# Altium PCB ESC_S1.PcbDoc
Units mil, origin at the board's own origin, x right, y up, seen from the top; angles counter-clockwise.
Board outline 1797 x 1751 mil, 4 copper layers (L1, L2, L3, L4), stack 23.756 mil thick; 77 components, 53 nets, 246 pads, 314 vias.
Unrouted connection lines stored in the file: 151.
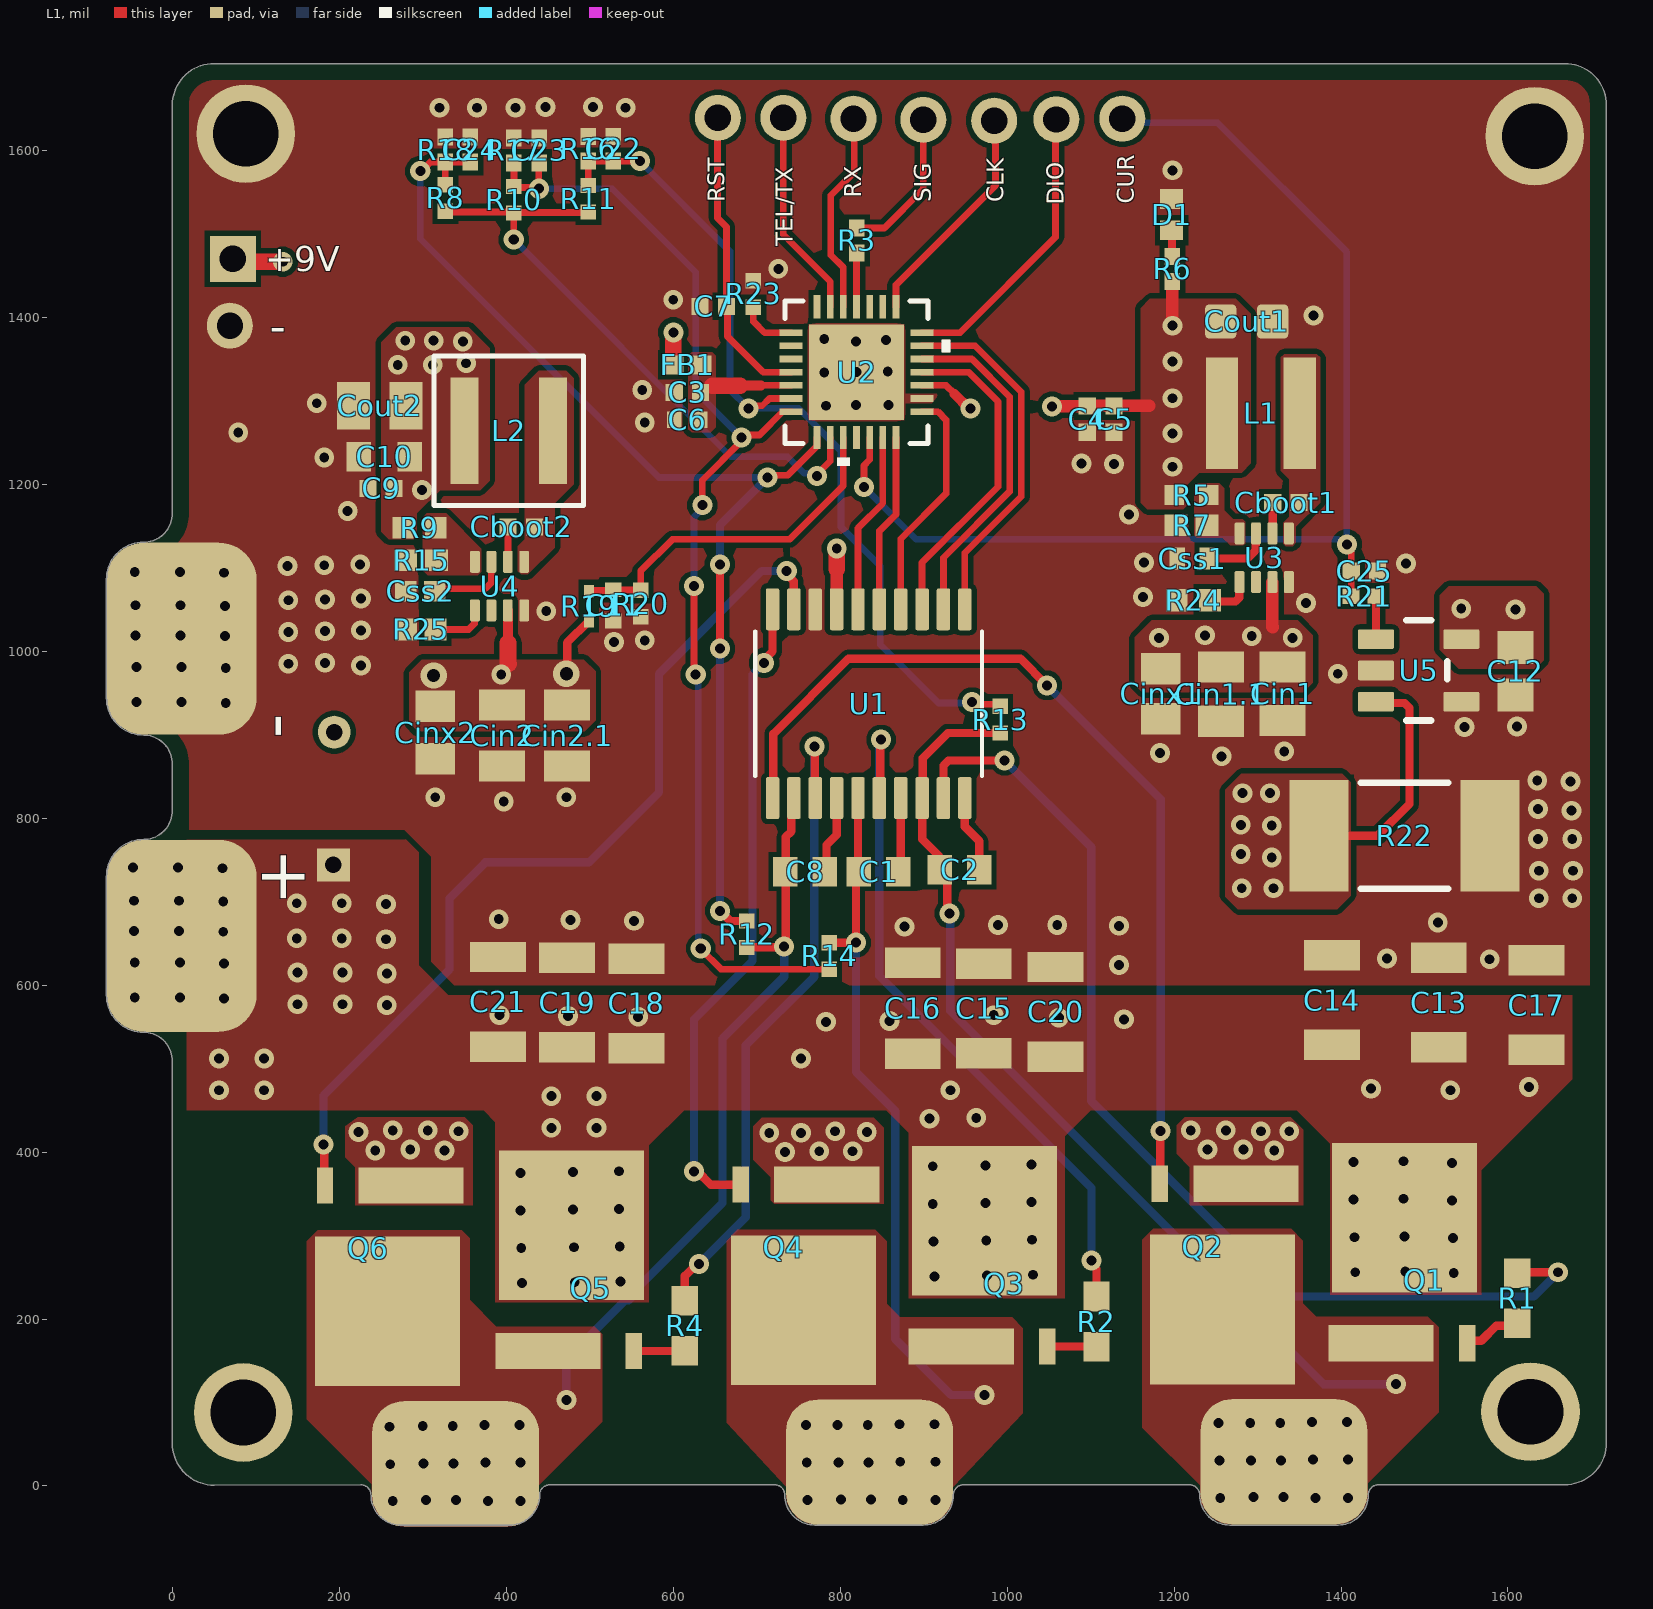
[diagram p0: L1 view]
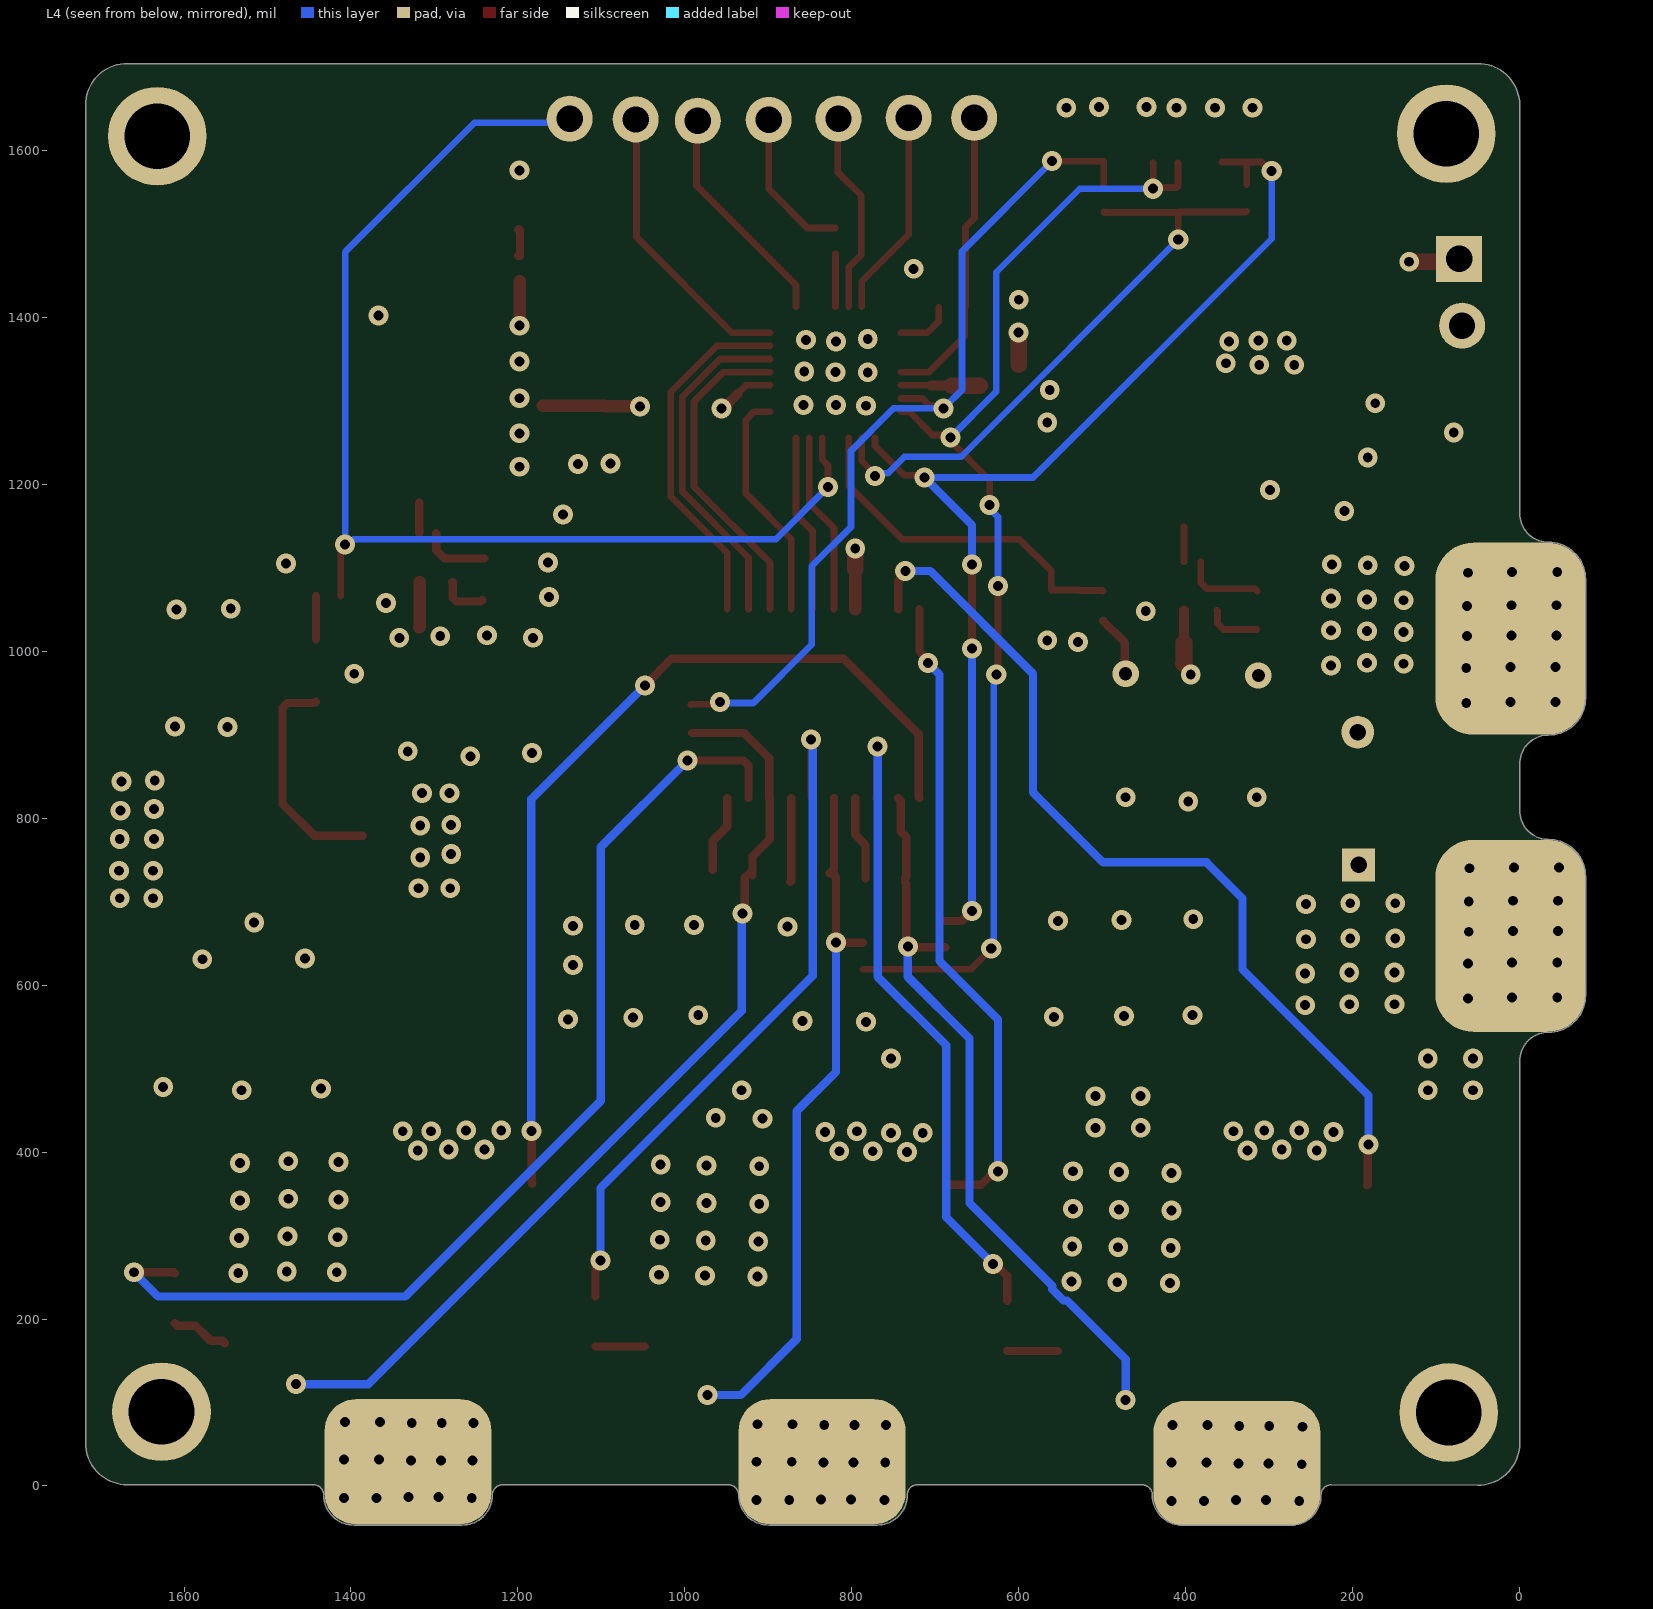
[diagram p1: L4 view, seen from below]
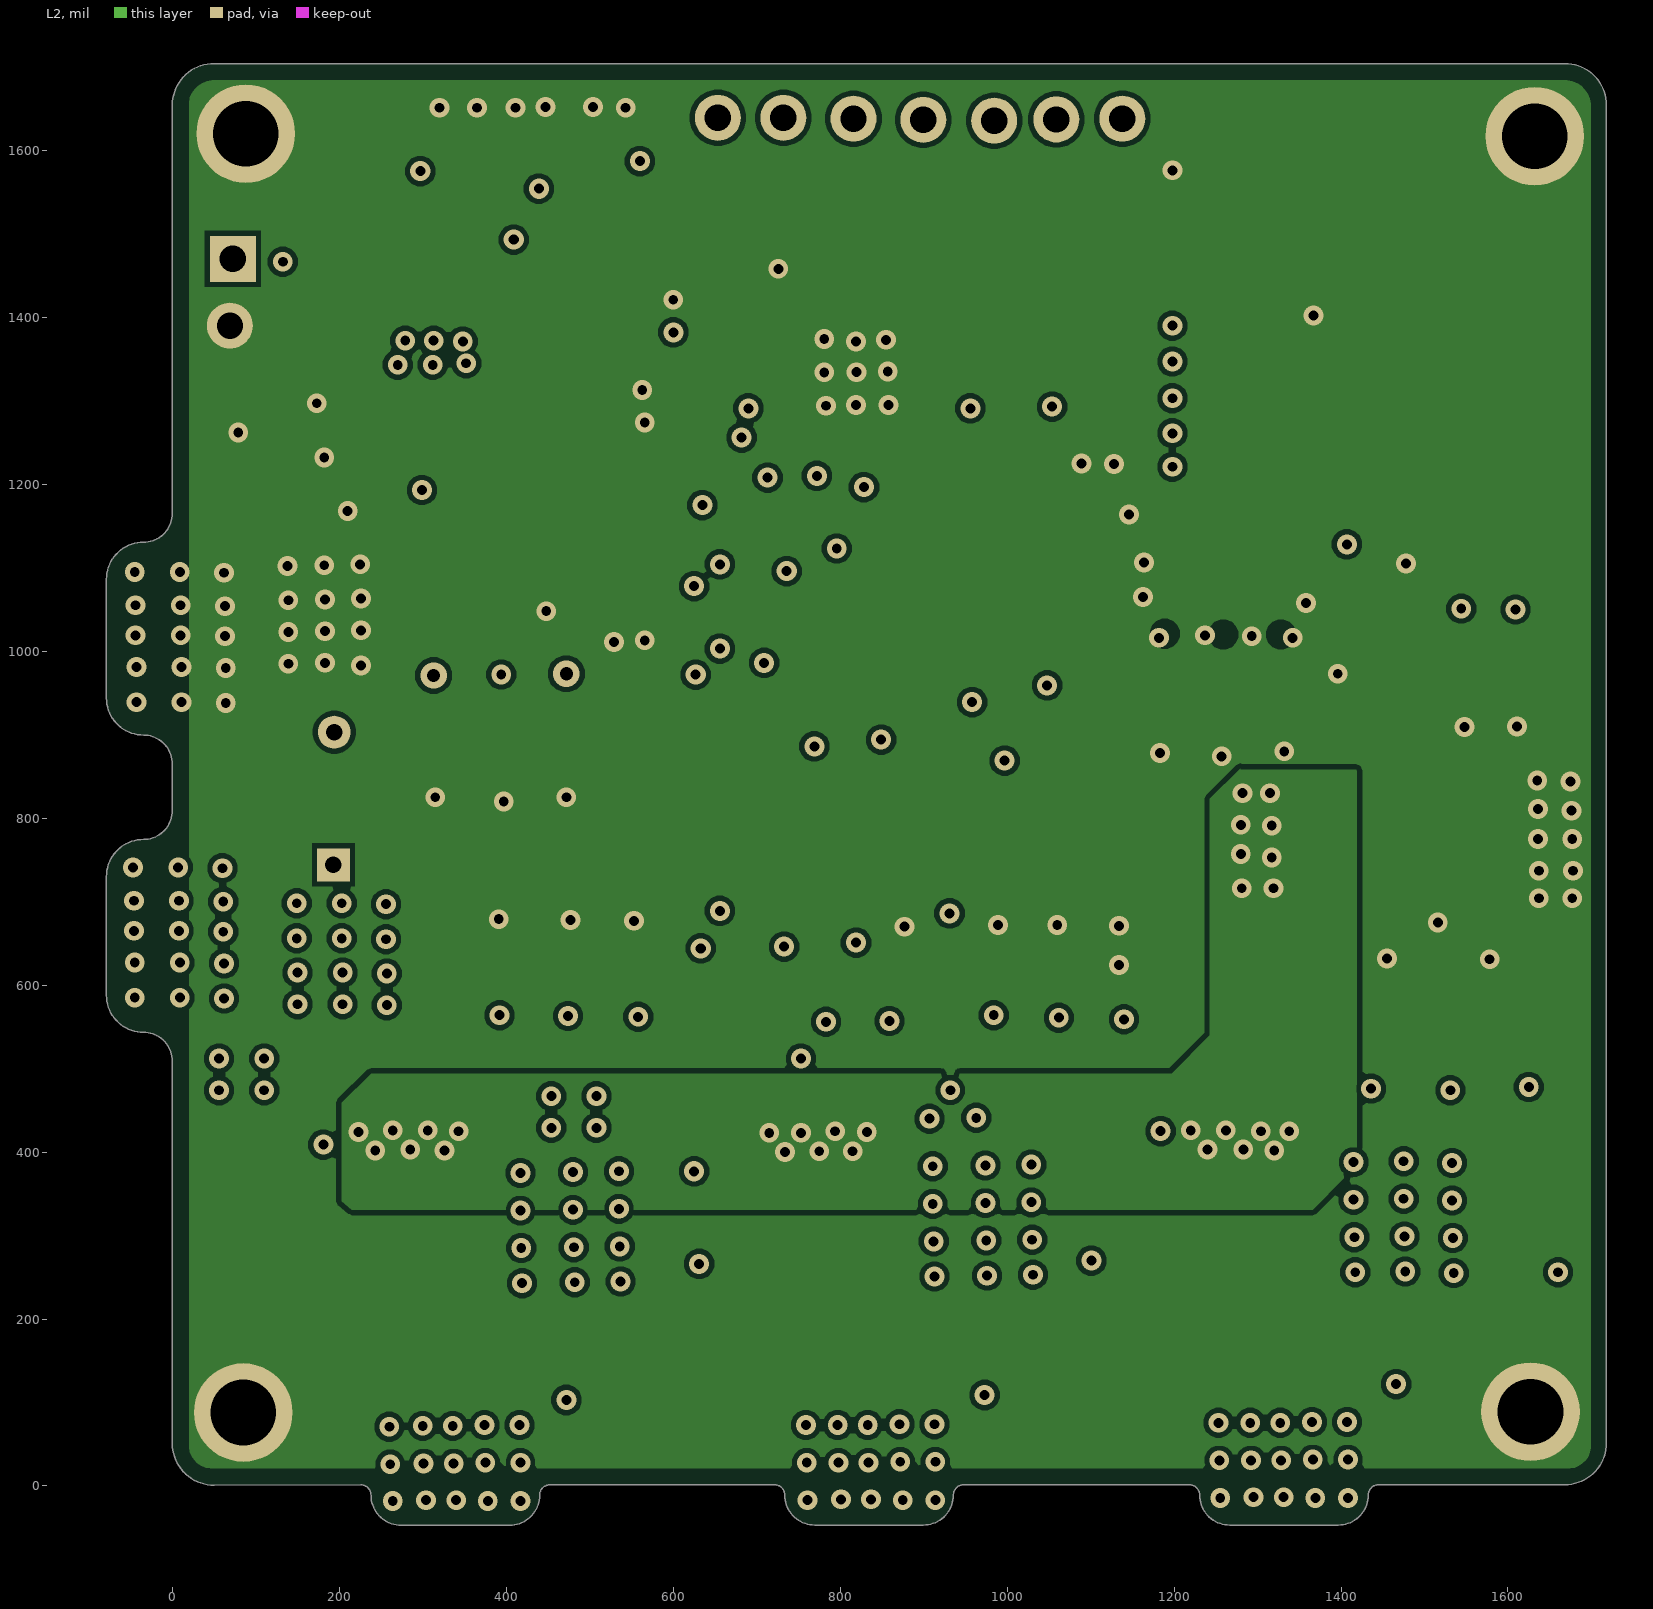
[diagram p2: L2]
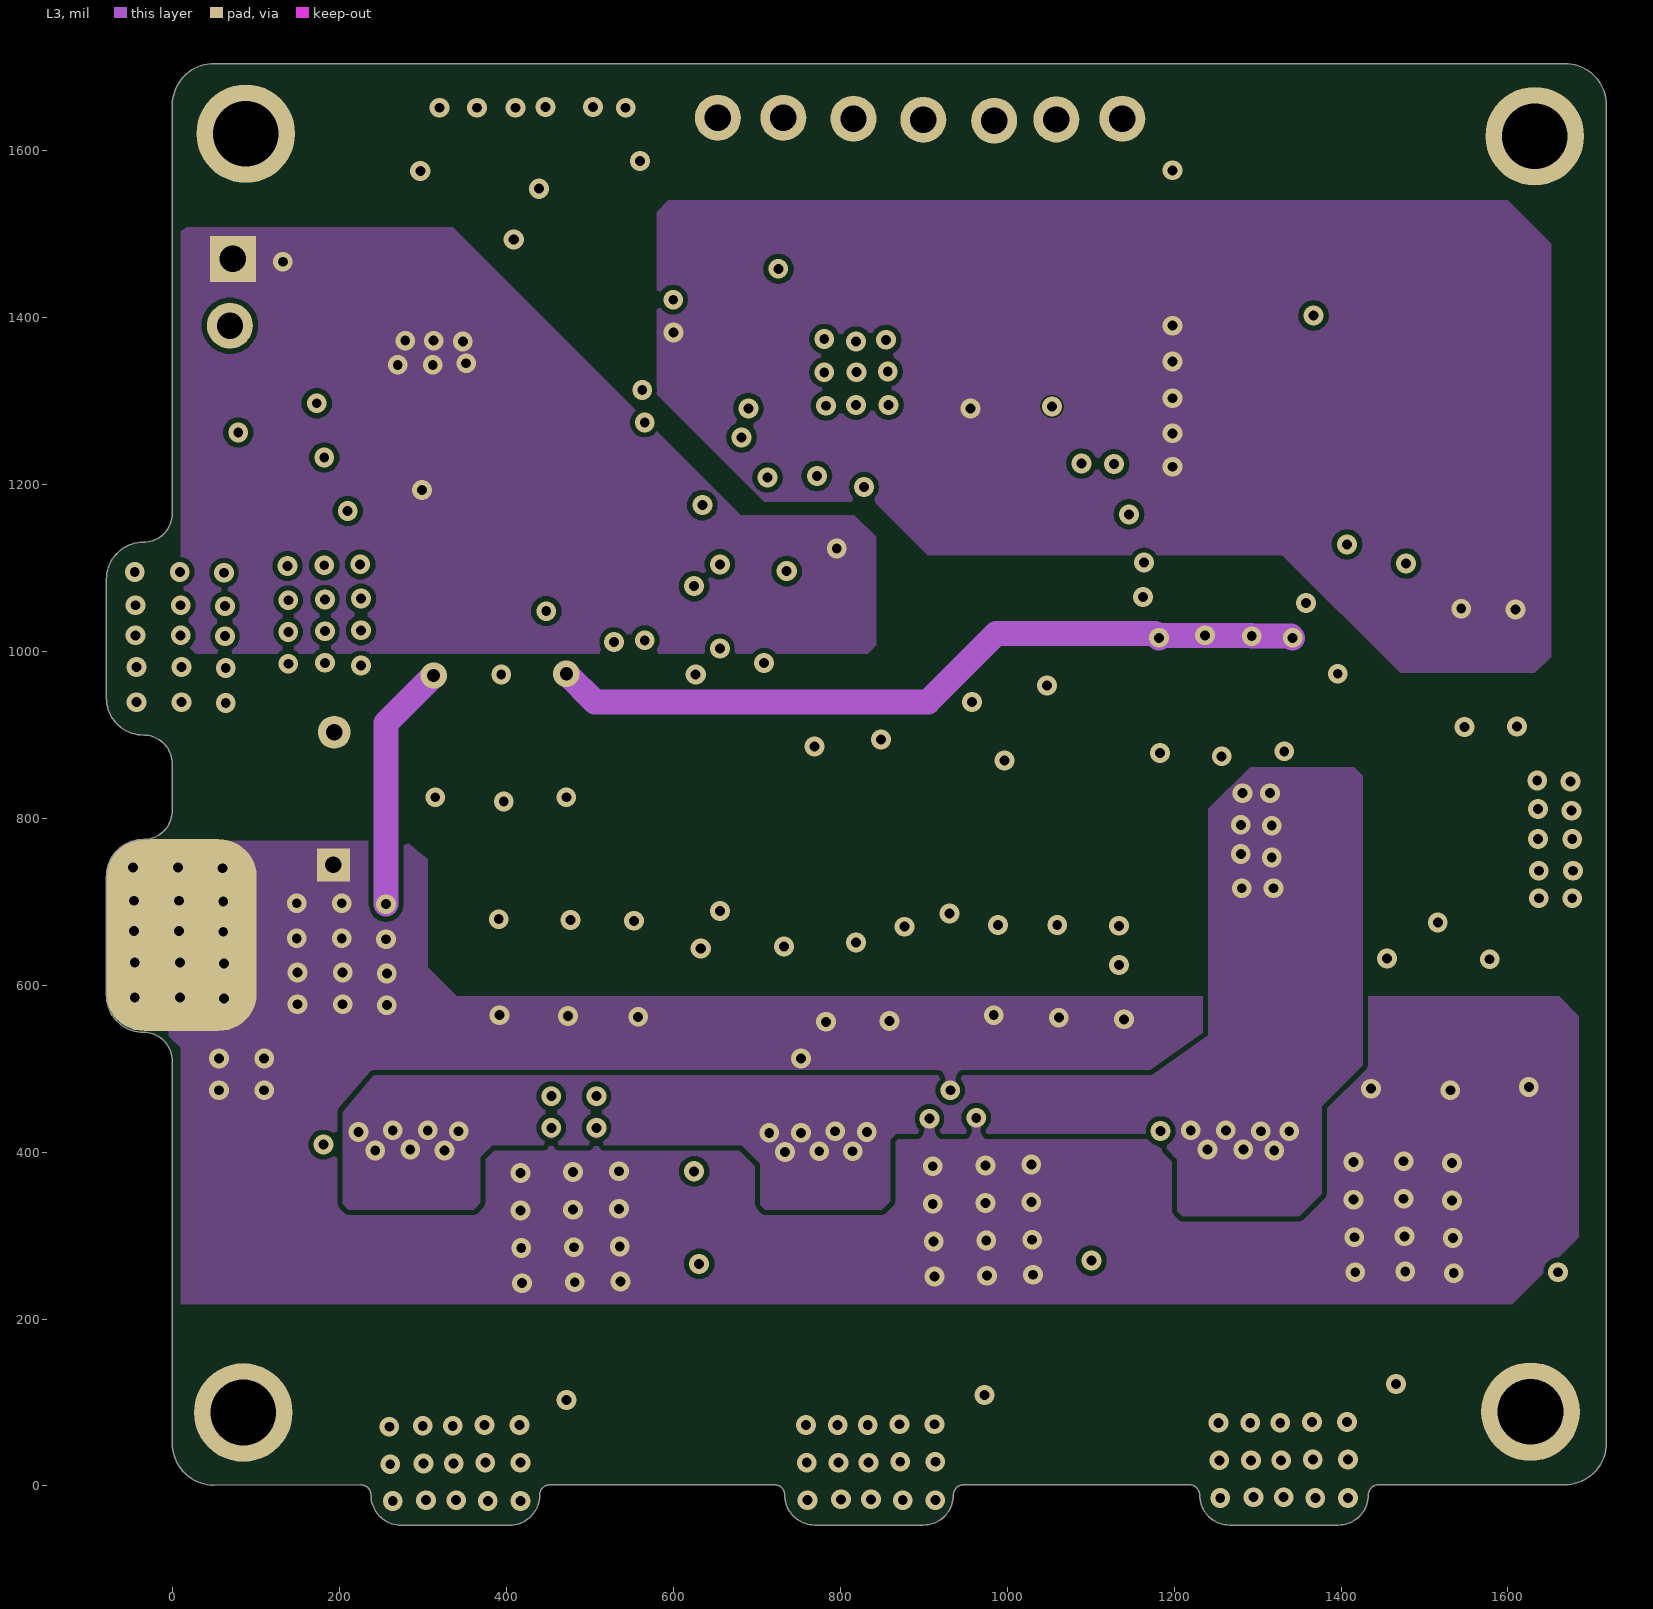
[diagram p3: L3]
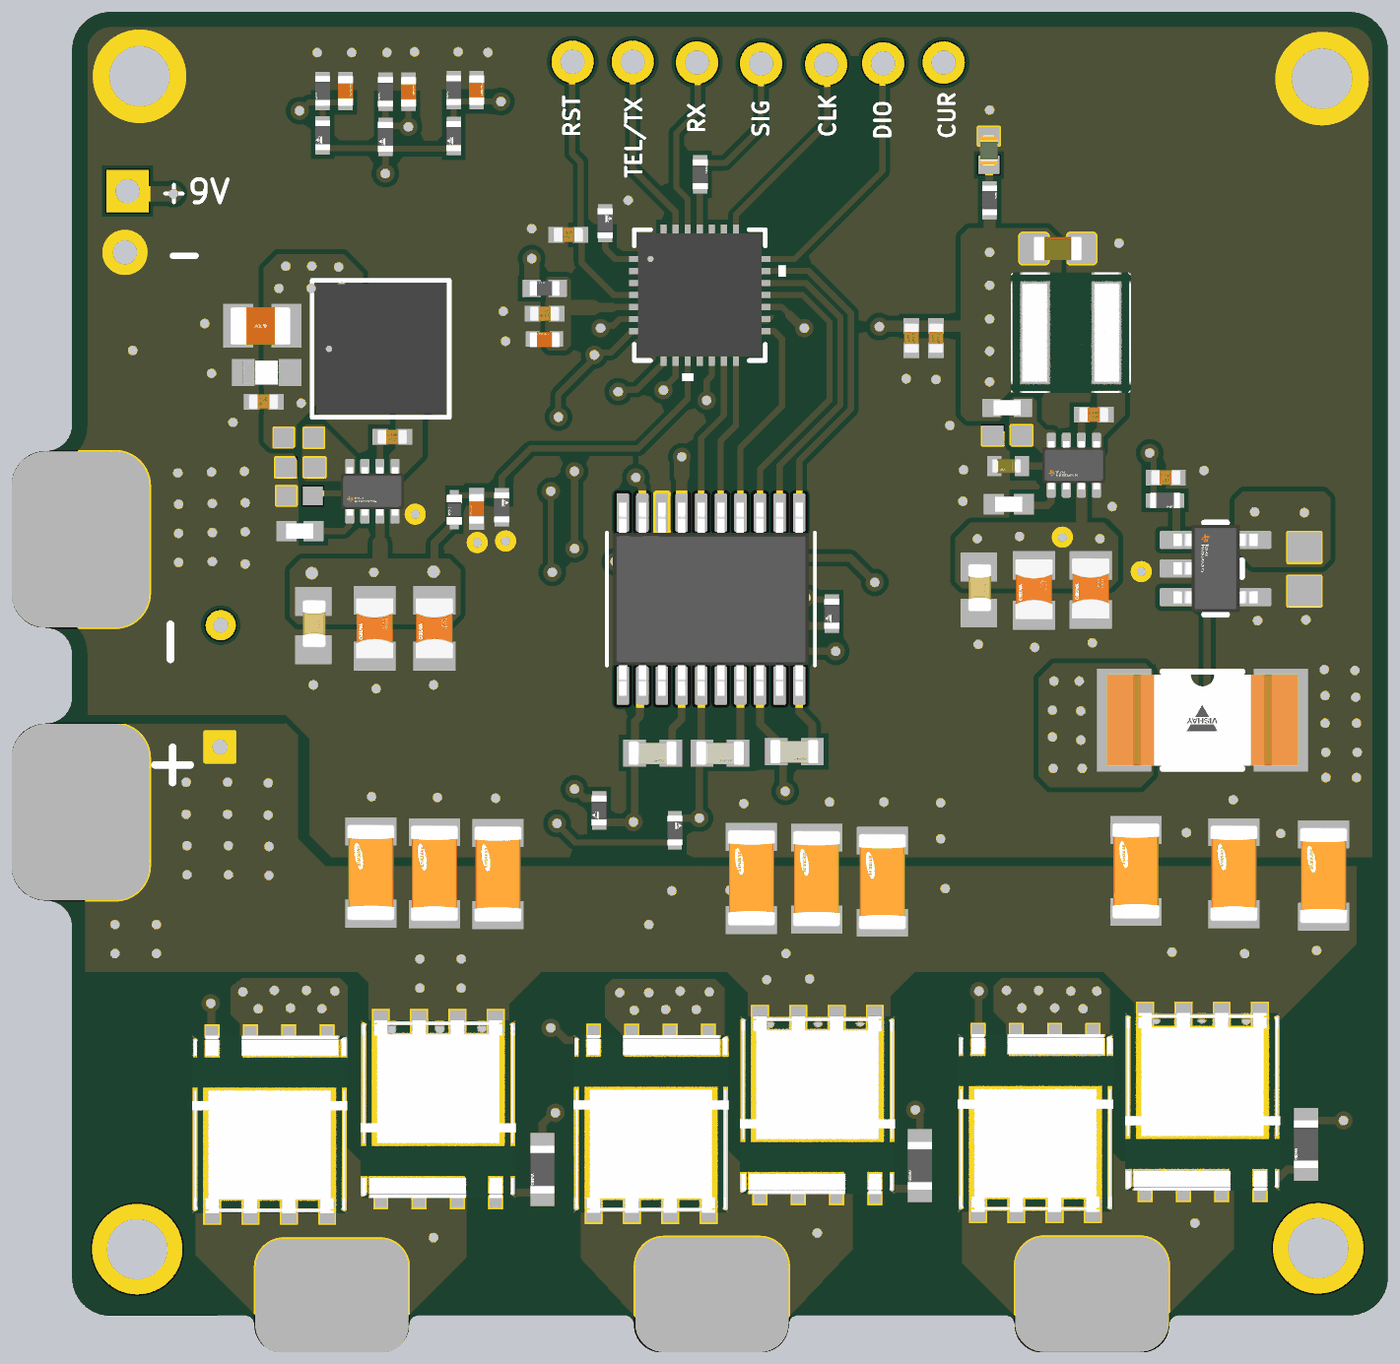
[diagram p4: 3D render of the assembled board from above, using the file's embedded part models]

## Layer stack, top to bottom
Top Solder: solder mask 0.4, Solder Resist, Dk 3.5
L1: signal copper 1.4
Dielectric 2: prepreg 2.8, PP-006, Dk 4.1
L2: signal copper 1.378
Dielectric 3: prepreg 2.8, PP-006, Dk 4.1
L3: signal copper 1.378
Dielectric 1: dielectric 12.6, FR-4, Dk 4.8
L4: signal copper 1.4
Bottom Solder: solder mask 0.4, Solder Resist, Dk 3.5

## Board outline
0,488 0,509 ccw(c-34.51,509) -34.51,543.51 cw(c-34.51,588) -79,588 -79,730 cw(c-34.51,730) -34.51,774.49 ccw(c-34.51,809) 0,809 0,865 ccw(c-34.51,865) -34.51,899.51 cw(c-34.51,944) -79,944 -79,1086 cw(c-34.51,1086) -34.51,1130.49 ccw(c-34.51,1165) 0,1165 0,1654 cw(c50,1654) 50,1704 1668,1704 cw(c1668,1654) 1718,1654 1718,51.56 cw(c1668,51.56) 1668,1.56 1445.05,1.56 ccw(c1445.05,-10.85) 1432.64,-10.85 cw(c1396.64,-10.85) 1396.64,-46.85 1266.64,-46.85 cw(c1266.64,-10.85) 1230.64,-10.85 ccw(c1218.24,-10.85) 1218.24,1.56 948.05,1.56 ccw(c948.05,-10.85) 935.64,-10.85 cw(c899.64,-10.85) 899.64,-46.85 769.64,-46.85 cw(c769.64,-10.85) 733.64,-10.85 ccw(c721.24,-10.85) 721.24,1.56 712.05,1.56 cw(c711.89,1.56) 711.89,1.4 452.4,1.4 ccw(c452.4,-11) 440,-11 cw(c404,-11) 404,-47 274,-47 cw(c274,-11) 238,-11 ccw(c225.6,-11) 225.6,1.4 50,1 cw(c50,51) 0,51

## Design rules (kind name [scope] priority, off if disabled: settings)
Clearance [All] p1: gap=6 ignorepadtopadclearanceinfootprint=FALSE
MinimumSolderMaskSliver [All] p1: minsoldermaskwidth=1
PlaneConnect [All] p1: pad.planeconnectstyle=Relief pad.reliefexpansion=20 pad.reliefentries=4 pad.reliefconductorwidth=10 pad.reliefairgap=10 via.planeconnectstyle=Direct via.reliefexpansion=20 via.reliefentries=4 via.reliefconductorwidth=10 via.reliefairgap=10
PolygonConnect [All] p1: connectstyle=Direct reliefconductorwidth=10 reliefentries=4 polygonreliefangle="90 Angle" airgapwidth=10
RoutingVias [All] p1: holewidth=12 width=24 viastyle="Through Hole" minholewidth=12 minwidth=24 maxholewidth=28 maxwidth=50
ShortCircuit [All] p1: allowed=TRUE
SilkToSolderMaskClearance [IsPad] p1: minsilkscreentomaskgap=3 clearancetoexposedcopper=TRUE
SolderMaskExpansion [All] p1: expansion=2 istentingtop=FALSE
SupplyNets "Schematic Supply Nets_1" [InNet('VDDA')] p1: voltage=0.000
SupplyNets "Schematic Supply Nets_3" [InNet('9V')] p2: voltage=0.000
SupplyNets "Schematic Supply Nets_2" [InNet('3V3')] p3: voltage=0.000
SupplyNets "Schematic Supply Nets" [InNet('GND')] p4: voltage=0.000
Width [All] p1: maxlimit=50 minlimit=6 preferedwidth=10 midlayer2_maxwidth=20 minimp=50.000000 maximp=50.000000 favimp=50.000000
26 further rules are at their usual default settings.

## Components (designator, comment, footprint, x,y, rotation, side; value= is the part's Value field where it differs from the comment)
C1 "330nF 16V" FP-C0603C-CF-MFG 846,736 r180 top value="0.33 μF"
C2 "330nF 16V" FP-C0603C-CF-MFG 943,738 r180 top value="0.33 μF"
C3 "100nF 25V" FP-C0402-BB-MFG 617,1310 r180 top value="0.10 μF"
C4 "100nF 25V" FP-C0402-BB-MFG 1096,1278 r270 top value="0.10 μF"
C5 "100nF 25V" FP-C0402-BB-MFG 1128,1278 r270 top value="0.10 μF"
C6 "1uF 35V" FP-0402-L_1_0_0_2-W_0_5_0-MFG#1 617,1276 r180 top
C7 "100nF 25V" FP-C0402-BB-MFG 648,1413 r180 top value="0.10 μF"
C8 "330nF 16V" FP-C0603C-CF-MFG 758,736 r180 top value="0.33 μF"
C9 "100nF 25V" FP-C0402-BB-MFG 250,1195 r180 top value="0.10 μF"
C10 "10uF 25V" FP-ZRB18AR61E106ME01L-MFG 254,1233 r180 top
C11 "1uF 35V" FP-0402-L_1_0_0_2-W_0_5_0-MFG#2 528,1055 r270 top
C12 "100nF 25V" CAPC1608X87X35ML15T15 1609,976 r90 top
C13 "10uF 50V X7R" FP-CL31B106KBHNNNE-MFG#1 1517,579 r90 top value=10uF
C14 "10uF 50V X7R" FP-CL31B106KBHNNNE-MFG#1 1389,582 r90 top value=10uF
C15 "10uF 50V X7R" FP-CL31B106KBHNNNE-MFG#1 972,572 r90 top value=10uF
C16 "10uF 50V X7R" FP-CL31B106KBHNNNE-MFG#2 887,573 r90 top value=10uF
C17 "10uF 50V X7R" FP-CL31B106KBHNNNE-MFG#1 1634,576 r90 top value=10uF
C18 "10uF 50V X7R" FP-CL31B106KBHNNNE-MFG#1 556,578 r90 top value=10uF
C19 "10uF 50V X7R" FP-CL31B106KBHNNNE-MFG#1 473,579 r90 top value=10uF
C20 "10uF 50V X7R" FP-CL31B106KBHNNNE-MFG#1 1058,568 r90 top value=10uF
C21 "10uF 50V X7R" FP-CL31B106KBHNNNE-MFG#1 390,580 r90 top value=10uF
C22 "2.2nF 50V" FP-CL286-IPC_C 528.27,1601.9 r90 top
C23 "2.2nF 50V" FP-CL286-IPC_C 439.27,1599.9 r90 top
C24 "2.2nF 50V" FP-CL286-IPC_C 357,1600.9 r90 top
C25 "100nF 25V" FP-C0402-BB-MFG 1428,1096 r0 top value="0.10 μF"
Cboot1 "100nF 16V" FP-C0402-BB-MFG 1334,1178 r0 top value="0.10 μF"
Cboot2 "100nF 16V" FP-C0402-BB-MFG 418,1149 r0 top value="0.10 μF"
Cin1 "4.7uF 50V" FP-CC0805-0_85-MFG#1 1330,951 r270 top value="4.7 uF"
Cin1.1 "4.7uF 50V" FP-CC0805-0_85-MFG#2 1256,950 r270 top value="4.7 uF"
Cin2 "4.7uF 50V" FP-CC0805-0_85-MFG#3 395,899 r270 top value="4.7 uF"
Cin2.1 "4.7uF 50V" FP-CC0805-0_85-MFG#3 473,899 r270 top value="4.7 uF"
Cinx1 "100nF 50V" FP-CGA3E-0_3-0_1-IPC_A#1 1185,952 r270 top
Cinx2 "100nF 50V" FP-CGA3E-0_3-0_1-IPC_A#2 316,905 r270 top
Cout1 "47uF 6.3V" CAPC1608X100N 1287,1395 r180 top
Cout2 "C2012X5R1V685K125AC" FP-C2012-125-0_2-IPC_B 246,1294 r180 top
Css1 "CGA2B3X5R1V333M050BB" FP-CGA2B-IPC_A 1220,1111 r180 top
Css2 "GRM155R71A333KA01D" CAPC1005X55X25NL05T10 297,1072 r0 top
D1 "GREEN" LED0402G 1197,1523 r270 top
FB1 "BLM15BD601SZ1D" FP-BLM15-0_05-IPC_B 617,1343 r180 top
L1 "XFL4020-152MEB" FP-XFL4020-MFG 1304,1285 r180 top
L2 "XGL4030-222MEC" IND_XGL4030_COC 403,1264 r0 top
Q1 "BSC010N04LSIATMA1" FP-PG-TDSON-8-MFG 1476,280.25 r0 top
Q2 "BSC010N04LSIATMA1" FP-PG-TDSON-8-MFG 1257.85,252.75 r180 top
Q3 "BSC010N04LSIATMA1" FP-PG-TDSON-8-MFG 973.15,276.25 r0 top
Q4 "BSC010N04LSIATMA1" FP-PG-TDSON-8-MFG 755.85,251.75 r180 top
Q5 "BSC010N04LSIATMA1" FP-PG-TDSON-8-MFG 478,271 r0 top
Q6 "BSC010N04LSIATMA1" FP-PG-TDSON-8-MFG 257.85,250.75 r180 top
R1 "10" FP-AC0603-MFG 1611,225 r270 top
R2 "10" FP-AC0603-MFG 1107,197 r270 top
R3 "1k 50V" FP-AC0402-IPC_C 820,1492 r90 top
R4 "10" FP-AC0603-MFG 614,192 r270 top
R5 "CRCW040227K4FKED" FP-CRCW0402-e3-MFG 1221,1187 r180 top
R6 "1k 50V" FP-AC0402-IPC_C 1198,1458 r90 top
R7 "10k" RESC1005X40X25ML05T10 1221,1151 r0 top
R8 "10k 50V" FP-MCS0402-IPC_C 327,1542.9 r270 top
R9 "CRCW0402102KFKED" RESC1005X40X25ML05T05 296,1148 r180 top
R10 "10k 50V" FP-MCS0402-IPC_C 409.27,1540.9 r270 top
R11 "10k 50V" FP-MCS0402-IPC_C 498.27,1541.9 r270 top
R12 "10k 50V" FP-MCS0402-IPC_C 688,661 r270 top
R13 "10k 50V" FP-MCS0402-IPC_C 992,918 r270 top
R14 "10k 50V" FP-MCS0402-IPC_C 787,635 r90 top
R15 "10k" RESC1005X40X25ML05T10 298,1109 r0 top
R16 "1k 50V" FP-AC0402-IPC_C 498.27,1601.9 r270 top
R17 "1k 50V" FP-AC0402-IPC_C 409.27,1599.9 r270 top
R18 "1k 50V" FP-AC0402-IPC_C 327,1600.9 r270 top
R19 "RN73R1ETTP1003B25" FP-RN73R1E-MFG 499,1054 r270 top
R20 "10k 50V" FP-MCS0402-IPC_C 561,1057 r90 top
R21 "1k 50V" FP-AC0402-IPC_C 1427,1066 r0 top
R22 "1m 5W" FP-WSLF2512-0_43-MFG 1476,779 r180 top
R23 "10k 50V" FP-MCS0402-IPC_C 696,1428 r90 top
R24 "CRCW04029K09FKED" FP-CRCW0402-e3-IPC_A#1 1223,1061 r0 top
R25 "CRCW04029K09FKED" FP-CRCW0402-e3-IPC_A#2 297,1026 r0 top
U1 "DRV8300DPWR" SOP65P640X120-20N 834.16,937.1 r270 top
U2 "AT32F421G8U7" QFN28_4x4_ART 819.59,1334.24 r0 top
U3 "XTPS62933DRLR" FP-DRL0008A-MFG 1308,1112 r90 top
U4 "XTPS62933DRLR" FP-DRL0008A-MFG 392,1078 r90 top
U5 "INA180A2IDBVT" FP-DBV0005A-MFG 1493,977 r0 top

## Footprints (in the part's own frame and the unit in brackets; to place one, negate y for a bottom-side part, rotate by r counter-clockwise, add the part's x,y. Pads: shape width x height; smd on the part's side, far side on the other; paste and mask are expansions set on the pad)
CAPC1005X55X25NL05T10 [mm] "Chip Capacitor, 2-Leads, Body 1.00x0.50mm, IPC Medium Density"
  rect 0.66x0.62 smd: 1(-0.44,0) 2(0.44,0)
  body extent -0.53,-0.28 0.53,0.27, height 0.55
CAPC1608X87X35ML15T15 [mm] "Chip Capacitor, 2-Leads, Body 1.60x0.80mm, IPC Low Density"
  rect 1x1.1 smd: 1(-0.725,0) 2(0.725,0)
  body extent -0.87,-0.48 0.87,0.47, height 0.87
CAPC1608X100N [mm]
  rrect25% 0.95x1.03 smd: 1(-0.79,0) 2(0.79,0)
  body extent -0.8,-0.4 0.8,0.4, height 1
FP-0402-L_1_0_0_2-W_0_5_0-MFG#1 [mm]
  rect 0.45x0.5 smd paste+0 mask+0: 1(-0.389,-0.025) 2(0.399,-0.025)
  body extent -0.5,-0.25 0.5,0.25, height 0.7
FP-0402-L_1_0_0_2-W_0_5_0-MFG#2 [mm]
  rect 0.45x0.5 smd paste+0 mask+0: 1(-0.475,0) 2(0.475,0)
  body extent -0.5,-0.25 0.5,0.25, height 0.7
FP-AC0402-IPC_C [mil]
  rect 20.29x18.6 smd paste+0 mask+0: 1(-14.9,0) 2(14.9,0)
  body extent -20,-10 20,10, height 15
FP-AC0603-MFG [mm]
  rect 0.9x0.8 smd paste+0 mask+0: 1(-0.762,0) 2(0.762,0)
  body extent -0.8,-0.4 0.8,0.4, height 0.55
FP-BLM15-0_05-IPC_B [mil]
  rect 24.23x22.54 smd paste+0 mask+0: 1(-16.87,0) 2(16.87,0)
  body extent -20,-10 20,10, height 22
FP-C0402-BB-MFG [mm]
  rect 0.52x0.52 smd paste+0 mask+0: 1(-0.4,0) 2(0.4,0)
  body extent -0.5,-0.25 0.5,0.25, height 0.55
FP-C0603C-CF-MFG [mm]
  rect 0.75x0.9 smd paste+0 mask+0: 1(-0.6,0) 2(0.6,0)
  body extent -0.8,-0.4 0.8,0.4, height 0.87
FP-C2012-125-0_2-IPC_B [mil]
  rect 39.37x57.33 smd paste+0 mask+0: 1(-34,0) 2(29,0)
  body extent -39,-25 39,25, height 57
FP-CC0805-0_85-MFG#1 [mm]
  rect 0.95x1.4 smd paste+0 mask+0: 1(-0.762,0) 2(0.864,0)
  body extent -1,-0.63 1,0.63, height 0.95
FP-CC0805-0_85-MFG#2 [mm]
  rect 0.95x1.4 smd paste+0 mask+0: 1(-0.787,0) 2(0.864,0)
  body extent -1,-0.63 1,0.63, height 0.95
FP-CC0805-0_85-MFG#3 [mm]
  rect 0.95x1.4 smd paste+0 mask+0: 1(-0.925,0) 2(0.925,0)
  body extent -1,-0.63 1,0.63, height 0.95
FP-CGA2B-IPC_A [mil]
  rect 18.6x26.48 smd paste+0 mask+0: 1(-20,0) 2(16,0)
  body extent -20,-10 20,10, height 22
FP-CGA3E-0_3-0_1-IPC_A#1 [mil]
  rect 37.65x47.49 smd paste+0 mask+0: 1(-27,-1) 2(33,-1)
  body extent -31,-16 31,16, height 43
FP-CGA3E-0_3-0_1-IPC_A#2 [mil]
  rect 37.65x47.49 smd paste+0 mask+0: 1(-29,-1) 2(34,-1)
  body extent -31,-16 31,16, height 43
FP-CL31B106KBHNNNE-MFG#1 [mm]
  rect 0.925x1.7 smd paste+0 mask+0: 1(-1.362,0) 2(1.362,0)
  body extent -1.92,-1 1.92,1, height 0.25
FP-CL31B106KBHNNNE-MFG#2 [mm]
  rect 0.925x1.7 smd paste+0 mask+0: 1(-1.397,0) 2(1.362,0)
  body extent -1.92,-1 1.92,1, height 0.25
FP-CL286-IPC_C [mil]
  rect 20.29x18.6 smd paste+0 mask+0: 1(-14.9,0) 2(14.9,0)
  body extent -20,-10 20,10, height 22
FP-CRCW0402-e3-IPC_A#1 [mil]
  rect 26.31x26.48 smd paste+0 mask+0: 1(-19.77,0) 2(19.77,0)
  body extent -20,-10 20,10, height 16
FP-CRCW0402-e3-IPC_A#2 [mil]
  rect 26.31x26.48 smd paste+0 mask+0: 1(-17,0) 2(18,0)
  body extent -20,-10 20,10, height 16
FP-CRCW0402-e3-MFG [mm]
  rect 0.6x0.6 smd paste+0 mask+0: 1(-0.525,0) 2(0.525,0)
  body extent -0.5,-0.25 0.5,0.25, height 0.4
FP-DBV0005A-MFG [mm]
  rrect17% 1.1x0.6 smd paste+0 mask+0: 1(-1.3,0.95) 2(-1.3,0) 3(-1.3,-0.95) 4(1.3,-0.95) 5(1.3,0.95)
  silkscreen extent -0.38,-1.53 0.87,1.53, body extent -1.4,-1.45 1.4,1.45, height 1.45
FP-DRL0008A-MFG [mm]
  rrect33% 0.67x0.3 smd paste+0 mask+0: 1(-0.74,0.75) 2(-0.74,0.25) 3(-0.74,-0.25) 4(-0.74,-0.75) 5(0.74,-0.75) 6(0.74,-0.25) 7(0.74,0.25) 8(0.74,0.75)
  body extent -0.8,-1.05 0.8,1.05, height 0.6
FP-MCS0402-IPC_C [mil]
  rect 18.32x18.6 smd paste+0 mask+0: 1(-15.89,0) 2(15.89,0)
  body extent -20,-10 20,10, height 15
FP-PG-TDSON-8-MFG [mm]
  rect 3.2x1.1 smd paste-1000 mask-1000: 1-2-3(-0.715,-2.775)
  rect 0.5x1.1 smd paste-1000 mask+0: 4(1.905,-2.775)
  rect 4.41x4.55 smd paste-1000 mask-1000: 5-6-7-8(0,1.05)
  body extent -2.82,-3.42 2.82,3.42, height 0.25
FP-RN73R1E-MFG [mm]
  rect 0.4x0.3 smd paste+0 mask+0: 1(-0.45,0) 2(0.45,0)
  body extent -0.5,-0.25 0.5,0.25, height 0.4
FP-WSLF2512-0_43-MFG [mm]
  rect 1.8x3.4 smd paste+0 mask+0: 1(-2.6,0) 2(2.6,0)
  silkscreen extent -1.33,-1.61 1.33,1.61, body extent -3.18,-1.51 3.18,1.51, height 0.81
FP-XFL4020-MFG [mm]
  rect 0.98x3.4 smd paste+0 mask+0: 1(-1.185,0) 2(1.185,0)
  body extent -2,-2 2,2, height 2.23
FP-ZRB18AR61E106ME01L-MFG [mm]
  rect 0.75x0.9 smd paste+0 mask+0: 1(-0.775,0) 2(0.775,0)
  body extent -0.8,-0.4 0.8,0.4, height 1.2
IND_XGL4030_COC [mil]
  rect 34x128 smd paste+0 mask+0: 1(-53,0) 2(53,0)
  silkscreen extent -90,-90 90,90, body extent -84,-84 84,84, height 122
LED0402G [mm]
  rect 0.6x0.7 smd: 1(-0.475,0) 2(0.475,0)
  body extent -0.5,-0.3 0.5,0.3, height 0.21
QFN28_4x4_ART [mm]
  rect 0.706x0.204 smd paste+0 mask+0: 1(-1.991,1.2) 2(-1.991,0.8) 3(-1.991,0.4) 4(-1.991,0) 5(-1.991,-0.4) 6(-1.991,-0.8) 7(-1.991,-1.2) 15(1.991,-1.2) 16(1.991,-0.8) 17(1.991,-0.4) 18(1.991,0) 19(1.991,0.4) 20(1.991,0.8) 21(1.991,1.2)
  rect 0.204x0.706 smd paste+0 mask+0: 8(-1.2,-1.991) 9(-0.8,-1.991) 10(-0.4,-1.991) 11(0,-1.991) 12(0.4,-1.991) 13(0.8,-1.991) 14(1.2,-1.991) 22(1.2,1.991) 23(0.8,1.991) 24(0.4,1.991) 25(0,1.991) 26(-0.4,1.991) 27(-0.8,1.991) 28(-1.2,1.991)
  rect 2.896x2.896 smd paste-1.448 mask+0: 29(0,0)
  silkscreen extent -2.17,-2.85 2.85,2.17, body extent -2.04,-2.04 2.04,2.04, height 0.79
RESC1005X40X25ML05T05 [mm] "Chip Resistor, 2-Leads, Body 1.00x0.50mm, IPC Low Density"
  rect 0.65x0.65 smd: 1(-0.5,0) 2(0.5,0)
  body extent -0.53,-0.27 0.53,0.28, height 0.4
RESC1005X40X25ML05T10 [mm] "Chip Resistor, 2-Leads, Body 1.00x0.50mm, IPC Low Density"
  rect 0.7x0.65 smd: 1(-0.475,0) 2(0.475,0)
  body extent -0.53,-0.27 0.53,0.28, height 0.4
SOP65P640X120-20N [mm]
  rrect25% 1.27x0.41 smd paste+0 mask+0.102: 1(-2.87,2.925) 2(-2.87,2.275) 3(-2.87,1.625) 4(-2.87,0.975) 5(-2.87,0.325) 6(-2.87,-0.325) 7(-2.87,-0.975) 8(-2.87,-1.625) 9(-2.87,-2.275) 10(-2.87,-2.925) 11(2.87,-2.925) 12(2.87,-2.275) 13(2.87,-1.625) 14(2.87,-0.975) 15(2.87,-0.325) 16(2.87,0.325) 17(2.87,0.975) 18(2.87,1.625) 19(2.87,2.275) 20(2.87,2.925)
  silkscreen extent -2.2,-3.45 2.2,3.45, body extent -3.2,-3.25 3.2,3.25, height 1.13

## Part data
C1 C2 C8: library part CMP-03020-005049-1, "CAP CER 0.33UF 16V X7R 0603", Capacitance="0.33 μF", Manufacturer=KEMET, Manufacturer Part Number=C0603C334M4RACTU, Package=C0603C-CF, Temperature="-55°C to +125°C", Temperature Characteristic=X7R, Temperature Coefficient=30ppm/°C, Temperature Range High=+125°C, Temperature Range Low=-55°C, Tolerance=0.2, Voltage Rating="16 V", Automotive=Yes, Automotive Grade="Grade 1", Category=Cap, ComponentLink2Description=Datasheet, ComponentLink2URL=https://api.kemet.com/component-edge/download/datasheet/C0603C100J5GACAUTO.pdf, Device Class L1="Passive Components", Device Class L2=Capacitors, Device Class L3="Ceramic Capacitors", Digikey Description="CAP CER 0.33UF 16V X7R 0603", Height=0.87mm, Lead Free=Yes, Material=Ceramic, Mouser Description="Multilayer Ceramic Capacitors MLCC - SMD/SMT 16volts 0.33uF X7R 20%", Octopart=https://octopart.com/c0603c334m4ractu-kemet-9139753, RoHS=TRUE
C3 C4 C5 C7 C9 C25: library part CMP-03020-014070-2, "CAP CER 0.1UF 25V X5R 0402", Capacitance="0.10 μF", Manufacturer=Kemet, Manufacturer Part Number=C0402C104M3PAC7867, Package=C0402-BB, Temperature="-55°C to +125°C", Temperature Characteristic=X5R, Temperature Coefficient=15%, Temperature Range High=+125°C, Temperature Range Low=-55°C, Tolerance=0.2, Voltage Rating="25 V", Automotive=No, Category=Cap, ComponentLink2Description=Datasheet, ComponentLink2URL=https://content.kemet.com/datasheets/KEM_C1002_X7R_SMD.pdf, Device Class L1="Passive Components", Device Class L2=Capacitors, Device Class L3="Ceramic Capacitors", Digikey Description="CAP CER 0.1UF 25V X5R 0402", Height=0.55mm, Lead Free=Yes, Material=Ceramic, Octopart=https://octopart.com/c0402c104m3pac7867-kemet-84304880, RoHS=TRUE, Ipc Land Pattern Name=CAPC10050X50
C6 C11: library part CMP-14477-003658-1, "Ceramic Capacitor General Use 1uF ±10% 35V X6S 0402"
C10: library part CMP-06035-062385-2, "CAP CER 10UF 25V X5R 0603", Capacitance=10uF, Case Code (Metric)=1608, Case Code (Imperial)=0603, Dielectric=X5R, Max Operating Temperature=85°C, Min Operating Temperature=-55°C, Tolerance=20%, Voltage=25V, Case/Package=0603, Depth=0.8mm, Height=1mm, Length=0.063inch, Mount="Surface Mount", Packaging="Cut Tape", REACH SVHC="No SVHC", RoHS Compliant=Yes, Thickness=0.047inch, Voltage Rating=25V, Voltage Rating (DC)=25V, Width=0.031inch
C12: library part CMP-2006-03295-1, Manufacturer=Kemet, Part Number=C0603T104K3RCLTU
C13 C14 C15 C16 C17 C18 C19 C20 C21: library part CMP-2000-07530-2, "CAP CER 10UF 50V X7R 1206", Capacitance=10uF, Manufacturer=Samsung, Manufacturer Part Number=CL31B106KBHNNNE, Temperature="-55°C to +125°C", Temperature Characteristic=X7R, Temperature Coefficient=15%, Temperature Range High=+125°C, Temperature Range Low=-55°C, Tolerance=10%, Voltage Rating=50V, Automotive=No, Category=Cap, ComponentLink2Description=Datasheet, ComponentLink2URL=http://www.samsungsem.com/global/front/downloadcms.do?path=%2F%2Fglobal%2F%2Fsupport%2F%2Fproduct-search%2F%2Fmlcc%2F%2F__icsFiles%2F%2Fafieldfile%2F%2F2019%2F%2F06%2F%2F18&fileName=CL31B106KBHNNNE-19.pdf, Device Class L1="Passive Components", Device Class L2=Capacitors, Device Class L3="Ceramic Capacitors", Digikey Description="CAP CER 10UF 50V X7R 1206", Height=1.8mm, Lead Free=Yes, Material=Ceramic, Octopart=https://octopart.com/cl31b106kbhnnne-samsung-30507377, Package=CL31B106KBHNNNE, RoHS=TRUE
C22 C23 C24: library part CMP-13271-000679-1, "Cap Ceramic 2.2nF 50V X7R ±10% SMD 0402 +125°C Paper T/R", Capacitance=2.2nF, Case Code (Metric)=1005, Case Code (Imperial)=0402, Dielectric=X7R, Max Operating Temperature=125°C, Min Operating Temperature=-55°C, Package Quantity=1, Tolerance=10%, Voltage Rating=50V, Case/Package=0402, Depth=0.5mm, Height=0.5mm, Length=0.039inch, Mount="Surface Mount", Packaging="Tape and Reel", Radiation Hardening=No, Thickness=0.022inch, Voltage Rating (DC)=50V, Width=0.02inch
Cboot1 Cboot2: library part CMP-2008-03082-2, "CAP CER 0.1UF 16V X7R 0402", Capacitance="0.10 μF", Manufacturer=Kemet, Manufacturer Part Number=C0402C104K4RACAUTO, Package=C0402-BB, Temperature="-55°C to +125°C", Temperature Characteristic=X7R, Temperature Coefficient=15%, Temperature Range High=+125°C, Temperature Range Low=-55°C, Tolerance=0.1, Voltage Rating="16 V", Automotive=No, Category=Cap, ComponentLink2Description=Datasheet, ComponentLink2URL=https://content.kemet.com/datasheets/KEM_C1002_X7R_SMD.pdf, Device Class L1="Passive Components", Device Class L2=Capacitors, Device Class L3="Ceramic Capacitors", Digikey Description="CAP CER 0.1UF 16V X7R 0402", Height=0.55mm, Lead Free=Yes, Material=Ceramic, Mouser Description="Cap Ceramic 0.1uF 16V X7R 10% Pad SMD 0402 125C Automotive T/R", Octopart=https://octopart.com/c0402c104k4racauto-kemet-17309149, RoHS=TRUE, Ipc Land Pattern Name=CAPC10050X50
Cin1 Cin1.1 Cin2 Cin2.1: library part CMP-03422-000966-1, "CAP CER 4.7UF 50V X5R 0805", Capacitance="4.7 uF", Manufacturer=Yageo, Manufacturer Part Number=CC0805KKX5R9BB475, Package=CC0805-0.85, Temperature="-30°C to +85°C", Temperature Characteristic=X5R, Temperature Range High=+85°C, Temperature Range Low=-30°C, Tolerance=0.1, Voltage Rating="50 V", Automotive=No, Category=Cap, ComponentLink2Description=Datasheet, ComponentLink2URL=http://www.yageo.com/documents/recent/UPY-GPHC_Y5V_6.3V-to-50V_8.pdf, Device Class L1="Passive Components", Device Class L2=Capacitors, Device Class L3="Ceramic Capacitors", Digikey Description="CAP CER 4.7UF 50V X5R 0805", Footprint Url=http://www.yageo.com/exep/pages/download/literatures/UPY-C_GEN_24.pdf, Height=0.95mm, Lead Free=Yes, Material=Ceramic, Octopart=https://octopart.com/cc0805kkx5r9bb475-yageo-81932641, RoHS=TRUE, Ipc Land Pattern Name=CAPC200125X85
Cinx1 Cinx2: library part CMP-2000-07546-2, "Cap Ceramic 100nF 50V X7R 10% Pad SMD 0603 +125°C Automotive T/R", Capacitance=100nF, Case Code (Metric)=1608, Case Code (Imperial)=0603, Dielectric=X7R, Max Operating Temperature=125°C, Min Operating Temperature=-55°C, Package Quantity=1, Ratings=AEC-Q200, Tolerance=10%, Voltage=50V, Case/Package=0603, Composition=Ceramic, Depth=0.8mm, Height=0.8mm, Lead Free="Lead Free", Length=1.6mm, Mount="Surface Mount", Packaging="Tape and Reel", Radiation Hardening=No, REACH SVHC="No SVHC", Termination=SMD/SMT, Thickness=0.035inch, Voltage Rating=50V, Voltage Rating (DC)=50V, Weight=7.1E-05oz, Width=0.8mm
Cout1: library part MSASJ168BB5476MRCA01, "47uF 6.3V 20% Multilayer Ceramic Capacitor X5R 0603 (1608 Metric)", Package="1608-2 TAIYO", Check_prices=https://www.snapeda.com/parts/MSASJ168BB5476MRCA01/Taiyo+Yuden/view-part/?ref=eda, MF="Taiyo Yuden", MP=MSASJ168BB5476MRCA01, SnapEDA_Link=https://www.snapeda.com/parts/MSASJ168BB5476MRCA01/Taiyo+Yuden/view-part/?ref=snap
Cout2: library part CMP-08246-006695-1, "Multilayer Ceramic Capacitors 6.8μF ±10% 35V X5R SMD 0805", Capacitance=6.8uF, Case Code (Metric)=2012, Case Code (Imperial)=0805, Dielectric Material=Ceramic, Max Operating Temperature=85°C, Min Operating Temperature=-55°C, Package Quantity=2000, Tolerance=10%, Voltage Rating=35V, Case/Package=0805, Lead Free="Lead Free", Length=0.079inch, Mount="Surface Mount", Packaging="Tape and Reel", RoHS Compliant=Yes, Series=C, Thickness=0.057inch, Voltage Rating (DC)=35V, Width=0.049inch
Css1: library part CMP-08246-000404-1, "Cap Ceramic 33nF 35V X5R 20% Pad SMD 0402 +85°C Automotive T/R", Capacitance=33nF, Case Code (Metric)=1005, Case Code (Imperial)=0402, Dielectric=X5R, Max Operating Temperature=85°C, Min Operating Temperature=-55°C, Package Quantity=10000, Ratings=AEC-Q200, Tolerance=20%, Voltage Rating=35V, Case/Package=0402, Height=0.5mm, Length=0.039inch, Mount="Surface Mount", Packaging="Tape and Reel", Thickness=0.022inch, Voltage Rating (DC)=35V, Weight=2.3E-05oz, Width=0.5mm
Css2: library part CMP-2008-04594-1, Manufacturer=Murata, Part Number=GRM155R71A333KA01D
D1: library part VLMG1500-GS08, "LED YLW-GRN 0402 SMD", Case Code (Metric)=1005, Case Code (Imperial)=0402, Color=Green,Yellow, Forward Current=30mA, Forward Voltage=2V, LCSC Part Number=C511404, Lens Color=Clear, Manufacturer=Vishay, Max Operating Temperature=85°C, Min Operating Temperature=-30°C, Package Quantity=1, Power Dissipation=75mW, Reverse Voltage=5V, Supplier Part Number=VLMG1500-GS08CT-ND, Test Current=20mA, Illumination Color=Green, Case/Package=0402, Category=LEDs, ComponentLink1Description=https://datasheet.ciiva.com/12071/vlmo1500-244705-12071911.pdf?src-supplier=Mouser, ComponentLink1URL=https://datasheet.ciiva.com/12071/vlmo1500-244705-12071911.pdf?src-supplier=Mouser, ComponentLink2Description=https://datasheet.ciiva.com/30005/vlmo1500-30005134.pdf?src-supplier=Avnet, ComponentLink2URL=https://datasheet.ciiva.com/30005/vlmo1500-30005134.pdf?src-supplier=Avnet, Depth=0.5mm, Dominant Wavelength=571nm, Height=0.35mm, Lead Free="Lead Free", Length=1mm, Lens Style=Rectangular, Luminous Intensity=35mcd, Manufacturer Part Number=VLMG1500-GS08, Mounting Technology="Surface Mount", Number of Elements=1, Number of LEDs=1, Packaging="Tape and Reel", Pins=2, Power Rating=75mW, Pricing="1=0.34, 10=0.265, 100=0.119, 500=0.10746, 1000=0.08827 (USD)", Radiation Hardening=No, Reach SVHC Compliant=Unknown, RoHS=Yes, RoHS Compliant=Yes, Series=CHipLED, Stock=98, Supplier=Digikey, Viewing Angle=130°, Wavelength=571nm, Width=0.5mm
FB1: library part CMP-06046-002695-1, "Chip Ferrite Bead, 0402, 600Ω @ 100MHz, 0.65Ω, 25%, 200mA", RoHS Compliant=Yes
L1: library part CMP-11268-000205-1, "Power inductor, shielded, 1.5uH 20% 15.8mOhm 6.7A, SMT, RoHS, halogen free", DC Resistance (DCR)=15.8mR, Max DC Current=9.1A, Max Operating Temperature=125°C, Min Operating Temperature=-40°C, Package Quantity=25, Self Resonant Frequency=59MHz, Test Frequency=100kHz, Tolerance=20%, Inductance=1.5uH, Core Material=Composite, Height=2.1mm, Lead Free="Contains Lead", Length=4.3mm, Packaging="Tape and Reel", RoHS Compliant=Yes, Series=XFL4020, Shielding=Shielded, Termination=SMD/SMT, Width=4.3mm
L2: "Description", Manufacturer_Name=Coilcraft, Copyright="Copyright (C) 2025 Ultra Librarian. All rights reserved.", Manufacturer_Part_Number=XGL4030-222MEC
Q1 Q2 Q3 Q4 Q5 Q6: library part CMP-32901-000662-1, "MOSFET N-CH 40V 37A/100A TDSON", Continuous Drain Current (ID)=100A, Drain to Source Voltage (Vdss)=40V, Gate to Source Voltage (Vgs)=20V, Max Operating Temperature=150°C, Max Power Dissipation=139W, Min Operating Temperature=-55°C, Power Dissipation=2.5W, Input Capacitance=6.2nF, Mount="Surface Mount", Number of Elements=1, Number of Pins=8, Packaging="Tape and Reel", Rds On Max=1.05mR, Rise Time=48ns, RoHS Compliant=Yes, Series=OptiMOS™
R1 R2 R4: library part CMP-03412-039150-1, "RES 10Ω 5.00% 0.1W 0603"
R3 R6 R16 R17 R18 R21: library part CMP-03412-047873-1, "RES 1kΩ ±1% 0.063W 0402", RoHS Compliant=Yes
R5: library part CMP-2002-08433-2, "RES Thick Film, 27.4kΩ, 1%, 0.063W, 100ppm/°C, 0402", Case Code (Metric)=1005, Case Code (Imperial)=0402, Max Operating Temperature=155°C, Max Power Dissipation=63mW, Min Operating Temperature=-55°C, Package Quantity=10, Resistance=27.4kR, Temperature Coefficient=100ppm/°C, Tolerance=1%, Voltage Rating=50V, Case/Package=0402, Composition="Thick Film", Contact Plating=Tin, Depth=0.5mm, Features="Automotive AEC-Q200", Height=0.35mm, Lead Free="Lead Free", Length=1mm, Military Standard=Not, Mount="Surface Mount", Number of Pins=2, Number of Terminations=2, Packaging="Tape and Reel", Power Rating=63mW, Radiation Hardening=No, Termination=SMD/SMT, Voltage Rating (DC)=50V, Weight=2.3E-05oz, Width=0.02inch
R7 R15: library part CMP-2002-03043-1, Manufacturer="Vishay Dale", Part Number=CRCW040210K0FKEDHP
R8 R10 R11 R12 R13 R14 R20 R23: library part CMP-2002-02447-2, "RES SMD 1.2K OHM 1% 1/10W 0402", Case/Package=0402, Max Operating Temperature=125°C, Max Power Dissipation=63mW, Min Operating Temperature=-55°C, Package Quantity=10000, Resistance=10kR, Temperature Coefficient=25ppm/°C, Tolerance=0.1%, Composition="Thin Film", Contact Plating=Tin, Depth=0.5mm, Height=0.015inch, Lead Free="Lead Free", Length=0.039inch, Military Standard=Not, Number of Terminations=2, Packaging="Tape and Reel", Width=0.02inch
R9: library part CMP-1011-00737-2, Manufacturer="Vishay Dale", Part Number=CRCW0402102KFKED
R19: library part CMP-04015-069824-1, "100kΩ ±0.1% 0.063W, 1/16W Chip Resistor 0402 (1005 Metric) Moisture Resistant Thin Film"
R22: library part CMP-02407-013110-1, "RES 0.001 OHM 1% 5W 2512", Case Code (Metric)=6432, Case Code (Imperial)=2512, Max Operating Temperature=170°C, Max Power Dissipation=5W, Min Operating Temperature=-65°C, Ratings=AEC-Q200, Resistance=1mR, Resistor Type="Metal Element", Temperature Coefficient=170ppm/°C, Tolerance=1%, Case/Package=2512, Features="Moisture Resistant", Height=0.024inch, Lead Free="Lead Free", Length=0.25inch, Number of Terminations=2, Packaging="Cut Tape", RoHS Compliant=Yes, Series=WSLF, Width=0.125inch
R24 R25: library part CMP-2002-00285-2, "RES Thick Film, 9.09kΩ, 1%, 0.063W, 100ppm/°C, 0402", Case Code (Metric)=1005, Case Code (Imperial)=0402, Max Operating Temperature=155°C, Max Power Dissipation=63mW, Min Operating Temperature=-55°C, Package Quantity=10, Resistance=9.09kR, Temperature Coefficient=100ppm/°C, Tolerance=1%, Voltage Rating=50V, Case/Package=0402, Composition="Thick Film", Contact Plating=Tin, Depth=0.5mm, Features="Automotive AEC-Q200", Height=0.35mm, Lead Free="Lead Free", Length=1mm, Military Standard=Not, Mount="Surface Mount", Number of Pins=2, Number of Terminations=2, Packaging="Tape and Reel", Power Rating=63mW, Radiation Hardening=No, Termination=SMD/SMT, Voltage Rating (DC)=50V, Weight=2.3E-05oz, Width=0.02inch
U2: "Description", Manufacturer_Name=ARTERY, Copyright="Copyright (C) 2026 Ultra Librarian. All rights reserved.", Manufacturer_Part_Number=AT32F421G8U7, RefDes=RefDes, Type=Type
U3 U4: library part CMP-04918-000610-1, "3.8-V to 30-V, 3-A, 200-kHz to 2.2-MHz, low-IQ synchronous buck converter in SOT-583 package 8-SOT-5X3 -40 to 150"
U5: library part CMP-04895-000174-1, "IC CURR SENSE 1 CIRCUIT SOT23-5", Case/Package=SOT-23-5, Max Operating Temperature=125°C, Min Operating Temperature=-40°C, Operating Supply Current=260uA, Input Bias Current=100nA, Input Offset Voltage (Vos)=100uV, -3db Bandwidth=350kHz, Mount="Surface Mount", Number of Circuits=1, Packaging="Tape and Reel", RoHS Compliant=Yes, Slew Rate=2V/µs

## Free pads (board coordinates)
  rrect50% 180x230 smd: 18(11,659) 18(11,1015)
  rrect50% 180x230 smd far side: 18(11,659) 18(11,1015)
  rrect50% 180x230 on Mid1: 18(11,660)
  rrect50% 200x150 smd far side: 18(338.68,27) 18(835.68,29) 18(1331.68,29)
  rrect50% 200x150 smd: 18(339.28,26.55) 18(835.28,28.55) 18(1331.68,29)
  round 55.12 hole 31.5: 24(69,1390) 24(653.5,1639) 24(732,1639) 24(816,1638) 24(899.56,1636.58) 24(984.56,1635.58) 24(1059,1637) 24(1138,1638)
  rect 55.12x55.12 hole 31.5: 24(72.5,1470)
  rect 39.37x39.37 hole 19.68: 24(193,744)
  round 39.37 hole 19.68: 24(194,903)
  round 118.11 hole 78.74: 25(85,88) 25(88,1620) 25(1627,89) 25(1632,1617)

## Via types
v1: diameter 23.62, hole 11.81, L1 to L4, tented both sides, 258 vias
v2: diameter 24.02, hole 12, L1 to L4, tented both sides, 49 vias
v3: diameter 23.62, hole 11.81, L1 to L4, 5 vias
v4: diameter 31.5, hole 15.75, L1 to L4, tented both sides, 2 vias

## Nets (pads, with @x,y where several pads share a name; then routed paths per layer and width w, separated by ;. In a path a pad name is that pad's centre, name@x,y a point inside that pad or via, vN(x,y) a via of type N, cw(c..) or ccw(c..) an arc to the next point about the centre after c; other vN are vias at no path point)
3V3: C4.1 C5.1 C12.2 Cout1.2 FB1.2 L1.2 R5.2 R6.1 U2.17 U5.5 | length 278.7
  L1 w8: U2.17 927,1318.5 937,1308.5 937,1308
  L1 w12: 937,1308 954,1291 v2(956,1291)
  L1 w15: v2(1054,1293) 1054.37,1293.37 1095.63,1293.37 C4.1 C5.1 1170,1293.75 ; v1(1198,1390) R6.1
  L1 w20: FB1.2 v2(600.13,1381.87)
  L3 w15: v2@1053.5,1293.5 v2(1054,1293)
  other v1: 1609,1050 1544,1051 1198,1221 1198,1261 1198,1303 1198,1347
9V: C9.1 C10.1 Cout2.1 L2.1 pad.24@72.5,1470 R9.2 U1.7 | length 133.3
  L1 w15: U1.7 795.78,1097.78 796,1098
  L1 w20: pad.24@72.5,1470 76,1466.5 v1@131.38,1466.5 ; 796,1098 v1(796,1123)
  other v1: 299,1193 270,1343 312,1343 352,1345 348,1371 279,1372 313,1372 132.36,1466.5
AHIGH: U1.1 U2.20 | length 430.4
  L1 w8: U2.20 961.86,1365.74 1017,1310.6 1017,1185.4 949.32,1117.72 U1.1
ALOW: U1.4 U2.15 | length 282.6
  L1 w8: U1.4 872.55,1134.55 927,1189 927,1277 917.02,1286.98 U2.15
BEMF_COMMON: R8.2 R10.2 R11.2 U2.9 | length 737.4
  L1 w8: R8.2 328,1526.02 408.27,1526.02 R10.2 ; v2(409,1493) 409.13,1493.13 409.13,1524.88 R10.2 ; R11.2 497.77,1525.52 409.77,1525.52 R10.2 ; v2(772,1210) 772,1211.76 788.1,1227.85 U2.9
  L4 w8: v2(409,1493) 668.99,1233.01 736.99,1233.01 757.02,1212.98 769.02,1212.98 v2(772,1210)
BEMFA: C22.1 R11.1 R13.1 R16.2 U2.6 | length 1056.2
  L1 w8: R11.1 R16.2 C22.1 v2(560,1587) ; v2(690,1291) 693.06,1294.06 706.6,1294.06 715.28,1302.75 U2.6 ; v2(958,939) 960.56,936.44 992.63,936.44 R13.1@993.13,935.94
  L4 w8: v2(560,1587) 668,1479 668,1313 v2(690,1291) 750,1291 801.01,1239.99 801.01,1148.84 848,1101.85 848,1008 918,938 957,938 v2(958,939)
BEMFB: C23.1 R10.1 R14.1 R17.2 U2.7 | length 1424.3
  L1 w8: R17.2 R10.1 410.66,1555.4 437.6,1555.4 v2(439,1554) 439.13,1554.13 439.13,1584.87 C23.1 ; v2@625,1086 625,974 v2(627,972) ; v2(633,644) 633,643.33 657.22,619.11 R14.1 ; v2(635,1175) 634.74,1175.26 634.74,1204.41 682,1251.67 v2(682,1256) 685.06,1259.06 703.36,1259.06 731.28,1286.98 U2.7
  L4 w8: v2(439,1554) 527,1554 627,1454 627,1311 v2(682,1256) ; v2(625,1078) 625,1160.67 635,1170.67 v2(635,1175) ; v2(627,972) 630,969 630,647 v2(633,644)
BEMFC: C24.1 R8.1 R12.1 R18.2 U2.8 | length 1371.8
  L1 w8: v2(297,1575) 298.08,1575 309.08,1586 R18.2 ; R8.1 R18.2 ; C24.1 R18.2 ; v2(713,1208) 715.61,1210.61 737.01,1210.61 772.35,1245.95 U2.8
  L1 w10: v2(656,689) 656.22,689 668.33,676.89 R12.1 ; v2(656,1003) v2(656,1104)
  L4 w8: v2(297,1575) 297,1494 583,1208 v2(713,1208)
  L4 w10: v2(656,689) v2(656,1003) ; v2(656,1104) 656,1151 v2(713,1208)
BHIGH: U1.2 U2.19 | length 411.3
  L1 w8: U2.19 957.81,1349.99 1003,1304.8 1003,1191.2 923.73,1111.93 U1.2
BLOW: U1.5 U2.14 | length 214
  L1 w8: U1.5 846.96,1143.96 866.84,1163.84 U2.14
BTSA: C2.1 U1.20 | length 93.3
  L1 w10: U1.20 949.32,789.68 966.62,772.38 C2.1
BTSB: C1.1 U1.17 | length 100.6
  L1 w10: U1.17 872.55,725.07 C1.1@873.62,724
BTSC: C8.1 U1.14 | length 101.1
  L1 w10: C8.1@783.62,728 783.62,767.87 795.78,780.03 U1.14
CHIGH: U1.3 U2.18 | length 392.1
  L1 w8: U2.18 953.76,1334.24 989,1299 989,1197 898.14,1106.14 U1.3
CLOW: U1.6 U2.13 | length 218.1
  L1 w8: U1.6 821.37,1147.37 851.09,1177.09 U2.13
CURRENT_SENSE: C25.1 pad.24@1138,1638 R21.1 U2.12 | length 1457
  L1 w8: v2(828.52,1196.59) 828.52,1222.52 835.34,1229.34 U2.12 ; v2(1407,1128) 1407,1123.67 1412.25,1118.41 C25.1 1412.17,1095.92 1412.17,1066.08 R21.1
  L4 w8: v2(828.52,1196.59) 891.12,1134 1396.67,1134 1402.67,1128 v2(1407,1128) 1407,1478 1252,1633 1118,1633 pad.24@1138,1638
GHA: Q1.4 R1.2 | length 69.9
  L1 w10: Q1.4 1554,174 1568,174 1586,192 1608,192 R1.2
GHB: Q3.4 R2.2 | length 58.9
  L1 w10: Q3.4 R2.2
GHC: Q5.4 R4.2 | length 61.1
  L1 w10: Q5.4 613.75,161.75 R4.2
GLA: Q2.4 U1.11 | length 1109.6
  L1 w10: U1.11 720,825.11 720,901 810,991 1016,991 v2(1048,959) ; Q2.4 1183.43,362.57 1183.43,424.43 v2(1184,425)
  L4 w10: v2(1048,959) 1184,823 v2(1184,425)
GLB: Q4.4 U1.10 | length 774.5
  L1 w10: v2(625,377) 628.79,377 644.79,361 Q4.4 ; v2(709,986) 709,989.79 719.01,999.8 U1.10
  L4 w10: v2(625,377) 625,559 695,629 695,972 v2(709,986)
GLC: Q6.4 U1.9 | length 1106.3
  L1 w10: v2(181,409) 181.93,408.07 181.93,360.93 Q6.4 ; v2(736,1096) 736,1092.21 744.53,1083.67 744.53,1050.16 U1.9
  L4 w10: v2(181,409) 181,467.74 332,618.74 332,704 375,747 499,747 583,831 583,973 706,1096 v2(736,1096)
GND: C3.2 C4.2 C5.2 C6.2 C7.2 C9.2 C10.2 C11.2 C12.1 C13.2 C14.2 C15.2 C16.2 C17.2 C18.2 C19.2 C20.2 C21.2 C22.2 C23.2 C24.2 C25.2 Cin1.1.2 Cin1.2 Cin2.1.2 Cin2.2 Cinx1.2 Cinx2.2 Cout1.1 Cout2.2 Css1.2 Css2.1 D1.1 pad.18@11,1015 pad.24@69,1390 pad.25 R7.1 R15.1 R16.1 R17.1 R18.1 R20.1 R22.1 R23.2 R24.1 R25.1 U1.8 U2.16 U2.29 U3.4 U4.4 U5.2 U5.4 | length 1.4
  L1 w10: v3@447.13,1048.87 cw(c447.13,1048) v3(448,1048)
  other v1: 1134,624 1578,631 1455,632 877,670 1134,671 989,672 1060,672 1516,675 553,677 477,678 391,679 1637,704 1677,704 1637,737 1678,737 1636,775 1677,775 1676,809 1636,811 397,820 315,825 472,825 1675,844 1635,845 1257,874 1332,880 64,938 -43,939 11,939 64,980 -43,981 11,981 226,983 139,985 183,986 63,1018 -44,1019 10,1019 139,1023 183,1024 226,1025 63,1054 -44,1055 10,1055 139,1061 183,1062 226,1063 62,1094 -45,1095 9,1095 138,1102 182,1103 225,1104 210,1168 182,1232 79,1262 566,1274 783,1294 819,1295 858,1295 173,1297 563,1313 781,1334 819.59,1334.24 857,1335 819,1371 855,1373 781,1374 600,1421 726,1458 1198,1576 320,1651 365,1651 411,1651 543,1651 447,1652 504,1652
  other v2: 1183,878 1548,909 1611,910 1358,1058 1163,1065 1478,1105 1164,1106 1146,1164 1128,1224 1089,1225 1367,1402
  other v3: 1396,973 529,1011 566,1013
MOTORA: C2.2 pad.18@1331.68,29 Q1.1-2-3 Q2.5-6-7-8 R13.2 U1.18 | length 1140
  L1 w10: C2.2@919,731.69 919,754 898.14,774.86 U1.18 899,824.97 899,872 929,902 R13.2@991.11,902 ; C2.2@920.69,735.69 928.32,728.06 928.32,688.68 v2(931,686)
  L4 w10: v2@932,682 932,569 1379,122 v2(1466,122)
  other v1: 1255.25,-14.34 1369.25,-14.34 1408.25,-14.34 1295.25,-13.34 1331.25,-13.34 1254.25,30.66 1292.25,30.66 1328.25,30.66 1366.25,31.66 1408.25,31.66 1253.25,75.66 1291.25,75.66 1327.25,75.66 1365.25,76.66 1407.25,76.66
MOTORB: C1.2 pad.18@835.28,28.55 pad.18@835.68,29 Q3.1-2-3 Q4.5-6-7-8 R14.2 U1.15 | length 834.9
  L1 w10: R14.2 787.06,650.94 818.94,650.94 v2(819,651) 819,727.62 C1.2@821,733 ; U1.15 821.37,739.01 824.19,736.19 C1.2@826.38,734
  L4 w10: v2@819,650.13 819,496 866,449 866,176 933,109 v2(973,109)
  other v1: 761,-17 875,-17 914,-17 801,-16 837,-16 760,28 798,28 834,28 872,29 914,29 759,73 797,73 833,73 871,74 913,74
MOTORC: C8.2 pad.18@338.68,27 pad.18@339.28,26.55 Q5.1-2-3 Q6.5-6-7-8 R12.2 U1.12 | length 878.2
  L1 w10: R12.2 688.44,645.56 732.56,645.56 v2(733,646) 734.69,647.69 734.69,721.31 C8.2@736.38,723 ; C8.2@736.38,728 734.77,729.61 734.77,777.35 741.53,784.11 741.53,821.04 U1.12
  L4 w10: v2(472,103) 472,152 542.19,222.19 546.45,222.19 559.81,235.55 559.81,239.81 659,339 659,536 733,610 v2(733,646)
  other v1: 264,-18 378,-18 417,-18 304,-17 340,-17 261,26 301,27 337,27 375,28 417,28 260,71 300,72 336,72 374,73 416,73
NetCboot1_1: Cboot1.1 U3.6 | length 37
  L1 w10: U3.6 1318.05,1141.34 1318.05,1177.8 Cboot1.1
NetCboot1_2: Cboot1.2 L1.1 U3.5
NetCboot2_1: Cboot2.1 U4.6 | length 42
  L1 w8: U4.6 402.05,1107.34 402.05,1148.8 Cboot2.1
NetCboot2_2: Cboot2.2 L2.2 U4.5
NetCss1_1: Css1.1 U3.7 | length 82.3
  L1 w10: Css1.1 1288,1111 1298,1121 1298,1140.98 U3.7
NetCss2_2: Css2.2 U4.7 | length 97
  L1 w8: Css2.2 317.32,1075 375,1075 382.16,1082.16 U4.7
NetD1_2: D1.2 R6.2 | length 31.8
  L1 w10: R6.2@1197.5,1473.4 D1.2@1197.5,1503.8 ; D1.2@1199,1505.3 D1.2@1199.5,1504.8 ; R6.2@1199.5,1474.4 R6.2@1200,1473.9
NetQ2_1-2-3: Q2.1-2-3 Q4.1-2-3 Q6.1-2-3 R22.2 U5.3 | length 270.5
  L1 w10: R22.2@1385.64,779 1444,779 1482,817 1482,932.14 1476.14,938 1443.42,938 U5.3
  other v1: 734,400 775,401 815,401 243,402 326,402 1320,402 285,403 1240,403 1283,403 715,423 753,423 223,424 832,424 343,425 794,425 1304,425 1338,425 264,426 306,426 1220,426 1262,426 1281,716 1319,716 1317,753 1280,757 1317,791 1280,792 1282,830 1315,830
NetR1_1: R1.1 U1.19 | length 1283.2
  L1 w10: U1.19 923.73,863.14 929.59,869 v2(997,869) ; R1.1 1612,256 v1(1660,256)
  L4 w10: v2(997,869) 1100.81,765.19 1100.81,461.19 1335,227 1631,227 v1(1660,256)
NetR2_1: R2.1 U1.16 | length 846.3
  L1 w10: U1.16 847.98,825.13 847.98,892.98 v2(849,894) ; v2(1101,270) 1101,266.21 1107,260.21 R2.1
  L4 w10: v2(849,894) 847,892 847,611 1101,357 v2(1101,270)
NetR3_1: R3.1 U2.25 | length 63.4
  L1 w8: U2.25@819.61,1412.67 R3.1@819.61,1476
NetR4_1: R4.1 U1.13 | length 792.1
  L1 w10: R4.1 614,251.67 628.33,266 v2(631,266) ; v2(769,886) 769.59,885.41 769.59,824.7 U1.13
  L4 w10: v2(631,266) 687,322 687,528 769,610 v2(769,886)
NetR5_1: R5.1 R7.2 U3.8
NetR9_1: R9.1 R15.2 U4.8
NetR21_2: R21.2 U5.1 | length 51.6
  L1 w10: U5.1 1441.9,1014.49 R21.2
NetR23_1: R23.1 U2.1 | length 67.9
  L1 w8: R23.1 696,1395 709.51,1381.49 U2.1
NetR24_2: R24.2 U3.1 | length 56.9
  L1 w10: R24.2 1244.3,1059.47 1273.57,1059.47 1278.26,1064.16 1278.26,1082.65 U3.1
NetR25_2: R25.2 U4.1 | length 66
  L1 w8: R25.2 355,1026 362,1033 362,1048.39 U4.1
NRST: C7.1 pad.24@653.5,1639 U2.4 | length 360.9
  L1 w8: pad.24@653.5,1639 653,1634 653,1519 663.75,1508.25 C7.1 665,1411.75 665,1377 707.76,1334.24 U2.4
RX: pad.24@816,1638 U2.26 | length 243.7
  L1 w8: U2.26 803.85,1459.66 788.8,1474.7 788.8,1545.8 817,1574 817,1637 pad.24@816,1638
SIGNAL_INPUT: pad.24@899.56,1636.58 R3.2 | length 181.9
  L1 w8: R3.2 852.9,1506.9 899.56,1553.56 pad.24@899.56,1636.58
SWCLK: pad.24@984.56,1635.58 U2.22 | length 272.3
  L1 w8: U2.22 866.84,1438.84 986,1558 pad.24@986,1635.58
SWDIO: pad.24@1059,1637 U2.21 | length 348.5
  L1 w8: U2.21 943.49,1381.49 1058,1496 1058,1614 pad.24@1059,1637
TELEMETRY/TX: pad.24@732,1639 U2.27 | length 249.6
  L1 w8: pad.24@732,1639 732,1498.83 788.1,1442.73 U2.27
VBAT: C13.1 C14.1 C15.1 C16.1 C17.1 C18.1 C19.1 C20.1 C21.1 Cin1.1 Cin1.1.1 Cin2.1 Cin2.1.1 Cinx1.1 Cinx2.1 pad.18@11,659 pad.18@11,660 pad.24@193,744 Q1.5-6-7-8 Q3.5-6-7-8 Q5.5-6-7-8 R19.2 U3.3 U4.3 | length 1411.6
  L1 w10: v4@473,973.51 473,1010.28 R19.2
  L1 w12: U4.3 401.84,1010.16 402,1010
  L1 w15: U3.3 1317.84,1029.16 1318,1029
  L1 w20: 402,1010 402,986 403,985
  L3 w30: v1(256,697) 256,914 v4(313,971) ; v4@472.4,973 506.41,938.99 904.99,938.99 987,1021 1177,1021 v1(1182,1016) 1185,1019 1292,1019 v3(1293,1018) 1340,1018 v1(1342,1016)
  other v1: 419,243 482,244 537,245 913,251 976,252 1031,253 1535,255 1417,256 1477,257 418,285 481,286 536,287 912,293 975,294 1030,295 1534,297 1416,298 1476,299 417,330 480,331 535,332 911,338 974,339 1029,340 1533,342 1415,343 1475,344 417,375 480,376 535,377 911,383 974,384 1029,385 1533,387 1415,388 1475,389 454,429 508,429 907,440 963,441 454,467 508,467 56,474 110,474 932,474 1531,474 1436,476 1625,478 56,512 110,512 753,512 783,556 859,557 1140,559 1062,561 558,562 474,563 392,564 984,564 257,576 150,577 204,577 62,584 -45,585 9,585 257,614 150,615 204,615 62,626 -45,627 9,627 256,655 149,656 203,656 61,664 -46,665 8,665 149,698 203,698 61,700 -46,701 8,701 60,740 -47,741 7,741 394,972 1237,1019
  other v4: 472,973
VDDA: C3.1 C6.1 FB1.1 U2.5 | length 94.4
  L1 w8: 705,1318 705.5,1318.5 U2.5
  L1 w12: 680,1318 705,1318
  L1 w20: 647,1318 680,1318
VOLTAGE_SENSE: C11.1 R19.1 R20.2 U2.10 | length 429.1
  L1 w8: R19.1 499,1071.8 499.91,1072.71 527.01,1072.71 C11.1 528.41,1073.29 560.59,1073.29 R20.2 561,1096 599,1134 739.54,1134 803.85,1198.31 U2.10
pads on no net: U2.2 U2.3 U2.11 U2.23 U2.24 U2.28 U3.2 U4.2

## Polygon pours and split planes (outlines as drawn)
GND on L1 "NONET_L-01_P-001" (solid, remove dead copper, pour order 49): 20,1654 cw(c50,1654) 50,1684 1669,1684 cw(c1669,1655) 1698,1655 1698,600 338,600 310,628 310,754 278,786 20,786 20,867.2 ccw(c-27.8,867.2) 6,901 6,1129 ccw(c-27.8,1162.8) 20,1162.8 20,1164
VBAT on L1 "L1-VBAT" (solid, remove dead copper, pour order 55): 17,450 373,450 387,436 387,220 571,220 571,408 613,450 855,450 882,423 882,225 1069,225 1069,419 1100,450 1347,450 1387,410 1387,229 1568,229 1568,378 1677,487 1677,588 330.7,588 295,623.7 295,759 279.53,774.47 17,774.13
MOTORC on L1 "L1-MOTORC" (solid, pour order 47): 239,-10 ccw(c277,-10) 277,-48 403,-48 ccw(c403,-12) 439,-12 439,1 515,77 515,182 506,191 388,191 356,223 356,296.6 346.45,306.16 174.16,306.16 161,293 161,80 239,2 239,1
MOTORB on L1 "L1-MOTORB" (solid, pour order 45): 735.5,-9.5 ccw(c772,-9.5) 772,-46 899,-46 ccw(c899,-10) 935,-10 935,-1 935.64,-1 1019,87.4 1019,189 1006,202 872.06,202 856,218.06 856,293 842.11,306.89 676.89,306.89 664,294 664,75.99 735.5,-1
MOTORA on L1 "L1-MOTORA" (solid, pour order 43): 1231.33,-8.33 ccw(c1269,-8.33) 1269,-46 1394,-46 ccw(c1394,-8) 1432,-8 1432,0.73 1432,3.4 1517,88.4 1517,190 1504,203 1370.06,203 1354,219.06 1354,294 1340.11,307.89 1174.89,307.89 1162,295 1162,70.06 1231.33,0.73
3V3 on L1 "NONET_L-01_P-001" (solid, pour order 38): 1518,1002 1541,979 1633,979 1643,989 1643,1069 1634,1078 1529,1078 1518,1067 1518,1049 1518,1054 1518,1049
3V3 on L1 "L1-3V3" (solid, pour order 21): 1211,1170 1215,1174 1215,1199 1230,1214 1281,1214 1292,1225 1292,1404 1274,1422 1171,1422 1160,1411 1160,1178 1168,1170 1185,1170
GND on L1 "NONET_L-01_P-001" (solid, remove dead copper, pour order 35): 1540.5,708 1570.5,678 1686.5,678 1692.5,684 1692.5,856 1680.5,868 1559.5,868 1540.5,849 1559.5,868 1540.5,849
NetQ2_1-2-3 on L1 "NONET_L-01_P-001" (solid, pour order 26): 222,442 207,430.75 207,394 219,382 219,336 360,336 360,432 350,442
NetQ2_1-2-3 on L1 "NONET_L-01_P-001" (solid, pour order 28): 1401.5,853 1280.5,853 1261.5,834 1261.5,706 1276.5,691 1395.5,691 1411.5,707 1411.5,843
VBAT on L1 "NONET_L-01_P-001" (solid, pour order 25): 1173,1037 1153,1017 1153,960 1162,951 1355,951 1366,962 1366,1019 1348,1037
VBAT on L1 "NONET_L-01_P-001" (solid, pour order 24): 284,975 284,914 294,904 494,904 507,917 507,976 493,990 299,990
VDDA on L1 "NONET_L-01_P-001" (solid, pour order 23): 618,1266 622,1262 645,1262 651,1268 651,1270 651,1354 647,1358 622,1358 618,1354
9V on L1 "NONET_L-01_P-001" (solid, pour order 14): 293,1138 289,1134 259,1134 250,1143 250,1370 268,1388 355,1388 380,1363 380,1204 369,1193 321,1193 293,1165
NetR9_1 on L1 "NONET_L-01_P-001" (solid, pour order 13): 300,1097 306,1091 366,1091 370,1095 370,1123 328,1165 305,1165 300,1160
NetCboot2_2 on L1 "NONET_L-01_P-001" (solid, pour order 12): 422,1134 414,1126 414,1096 418,1092 426,1092 458,1124 458,1177 481,1200 481,1327 472,1336 439,1336 422,1319 422,1160 422,1319 422,1160
NetCboot1_2 on L1 "NONET_L-01_P-001" (solid, pour order 11): 1332,1356 1328,1352 1328,1216 1338,1206 1338,1161 1331,1154 1331,1129 1334,1126 1342,1126 1346,1130 1346,1149 1375,1178 1375,1352 1371,1356
NetR5_1 on L1 "NONET_L-01_P-001" (solid, pour order 10): 1285,1155 1285,1129 1283,1127 1267,1127 1258,1136 1227,1136 1224,1139 1224,1196 1229,1201 1254,1201 1260,1195 1260,1169 1271,1158 1282,1158
NetQ2_1-2-3 on L1 "NONET_L-01_P-001" (solid, pour order 6): 1203,398 1203,432 1213,442 1340,442 1355,427 1355,336 1343,336 1219.02,336 1219.02,381.98
NetQ2_1-2-3 on L1 "NONET_L-01_P-001" (solid, pour order 5): 696,391 696,431 706,441 840,441 852,429 852,338 845,338 721.02,338 717,342.02 717,370
NetQ2_1-2-3 on L3 "NONET_L-01_P-001" (solid, pour order 30): 1426,851 1416,861 1291,861 1241,811 1241,539.81 1173.32,492 241.4,492 204,448 204,338 211,331 361,331 369,339 369,394 383,408 682,408 704,386 704,337 710,331 850,331 860,341 860,415 867,422 1173,422 1204,391 1204,329 1210,323 1350,323 1377,350 1377,455 1426,504
VBAT on L3 "L3-VBAT" (solid, remove dead copper, pour order 33): -4.05,538.79 9.99,524.75 9.99,217.79 1604.95,217.79 1684.95,297.79 1684.95,562.79 1661.26,586.48 340.7,586.48 305.95,621.23 305.95,750.79 278.95,772.79 9.99,772.79 1.68,772.79 -4.05,769.96
9V on L3 "NONET_L-01_P-001" (solid, pour order 34): 17,1508 336,1508 681,1163 817,1163 843,1137 843,1007 833,997 28,997 10,1015 10,1502.91
3V3 on L3 "L3-3V3" (solid, pour order 40): 580,1308 709,1179 841,1179 892,1128 904.76,1115.24 1329.76,1115.24 1471,974 1632,974 1651.55,993.55 1651.55,1058.21 1651.55,1488 1599.55,1540 594,1540 580,1526
GND on L2 "NONET_L-01_P-001" (solid, remove dead copper, pour order 53): 1699,48 1699,1653 ccw(c1668,1653) 1668,1684 50,1684 ccw(c50,1654) 20,1654 20,49 ccw(c48,49) 48,21 1672,21 ccw(c1672,48)
NetQ2_1-2-3 on L2 "NONET_L-01_P-001" (solid, remove dead copper, pour order 52): 215,331 1366,331 1419,384 1419,857 1418,858 1280,858 1279,859 1243,823 1243,540 1197,494 238,494 203,459 203,341

## Silkscreen, mask and mechanical layers (free items; w line width, h text height)
Top Overlay:
  text "RX" at 825,1543.09 h20 r90
  text "RST" at 662,1538 h20 r90
  text "SIG" at 909,1538.09 h20 r90
  text "CLK" at 996,1538.09 h20 r90
  text "CUR" at 1152,1536.09 h20 r90
  text "DIO" at 1068,1535.09 h20 r90
  text "TEL/TX" at 743,1485.09 h20 r90
  text "+9V" at 111.06,1455.19 h30
  text "-" at 116.87,1370.2 h39.37
  text "-" at 105.01,925 h60 r270
  text "+" at 107.76,764.25 h60 r270
Mechanical 1:
  lines w10: -80,948 ccw(c-30,948) -30,898 cw(c-30,869) -1,869 -1,805 cw(c-31,805) -31,775 ccw(c-31,727) -79,727 -79,590 ccw(c-31,590) -31,542 cw(c-31,511) 0,511 0,51 ccw(c50,51) 50,1 226,1 cw(c226,-11) 238,-11 238,-13 ccw(c272,-13) 272,-47 404,-47 ccw(c404,-11) 440,-11 cw(c453,-11) 453,2 718,2 cw(c718,-14) 734,-14 ccw(c766,-14) 766,-46 901,-46 ccw(c901,-11) 936,-11 cw(c949,-11) 949,2 1212,2 cw(c1212,-17) 1231,-17 ccw(c1261,-17) 1261,-47 1400,-47 ccw(c1400,-14) 1433,-14 cw(c1448,-14) 1448,1 1668,1 ccw(c1668,51) 1718,51 1718,1656 ccw(c1671,1656) 1671,1703 50,1703 ccw(c50,1653) 0,1653 0,1162 0,1160 cw(c-29,1160) -29,1131 -30,1131 ccw(c-30,1081) -80,1081 -80,948

## Text inside footprints (layer, text, board x,y; h text height)
L2: Top 3D Body "RefDes2" at 315.5,1239 h50
U2: Top 3D Body "*" at 742.59,1364.36 h50